# Altium PCB PCB1.PcbDoc (part 1 of 2)
Units mil, origin at the board's own origin, x right, y up, seen from the top; angles counter-clockwise.
Board outline 3937.01 x 3937.01 mil, 4 copper layers (L1, L2, L3, L4), stack 61.811 mil thick; 168 components, 216 nets, 917 pads, 302 vias.
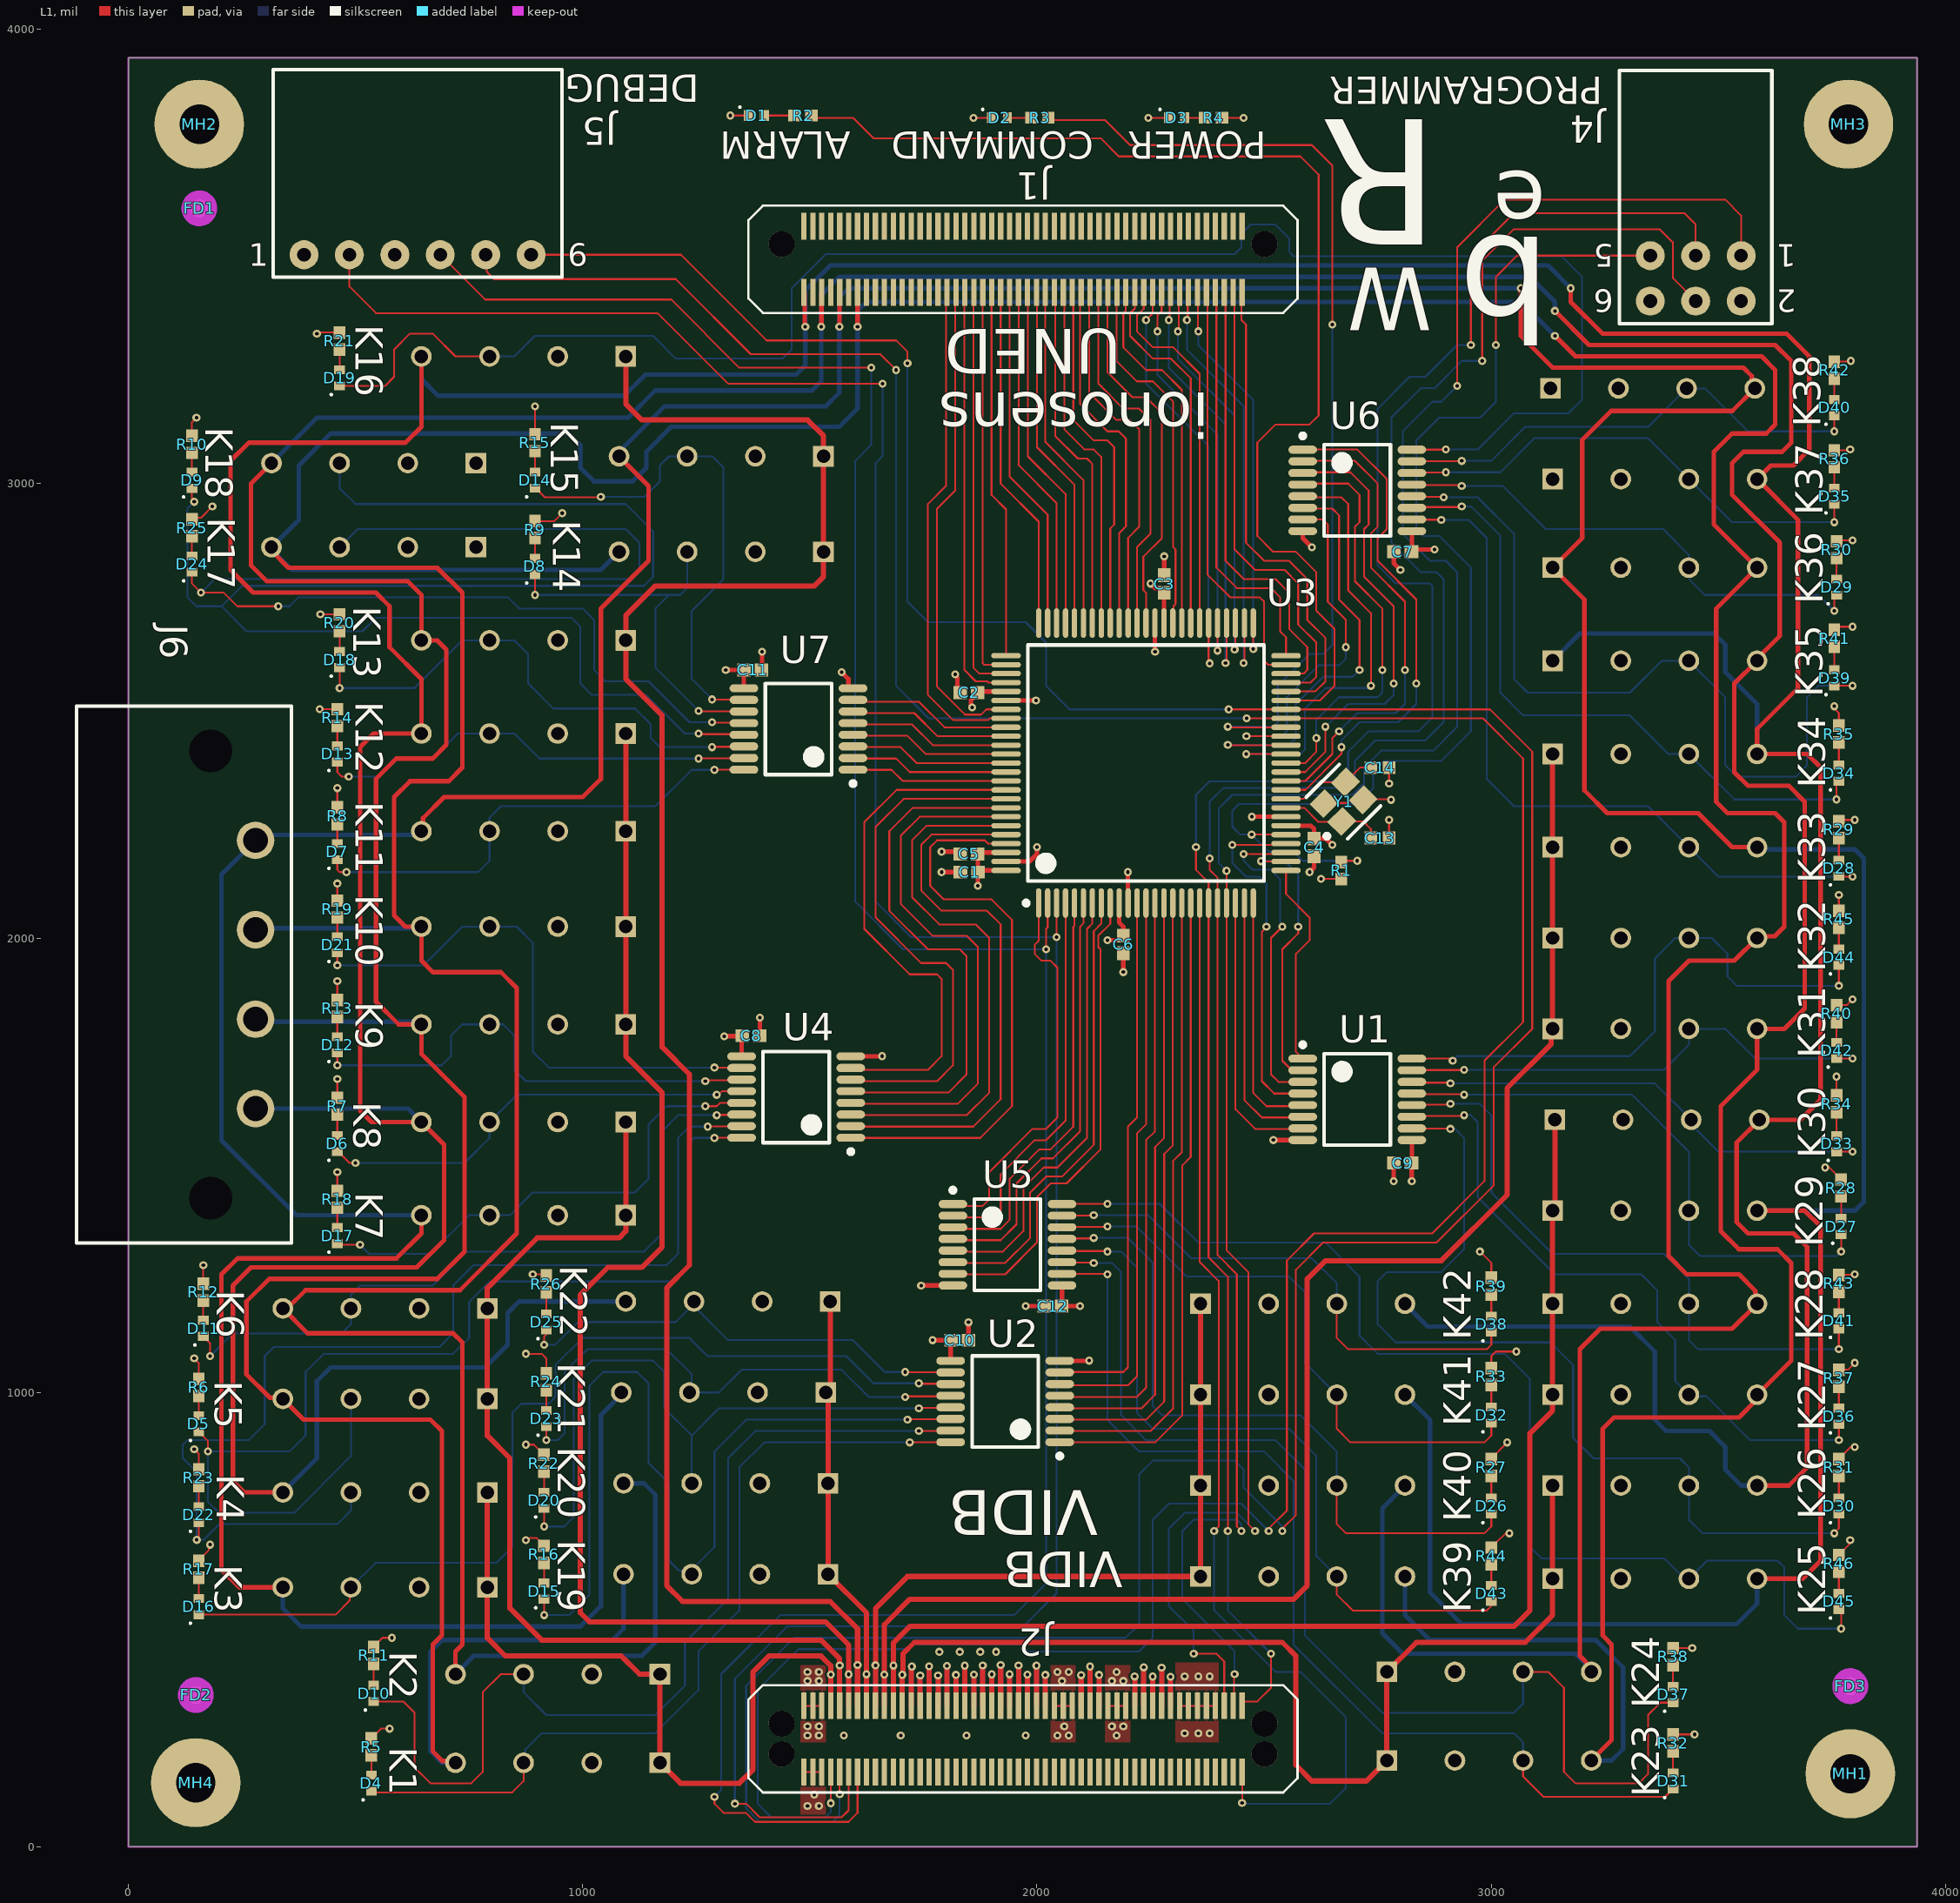
[diagram p0: L1 view]
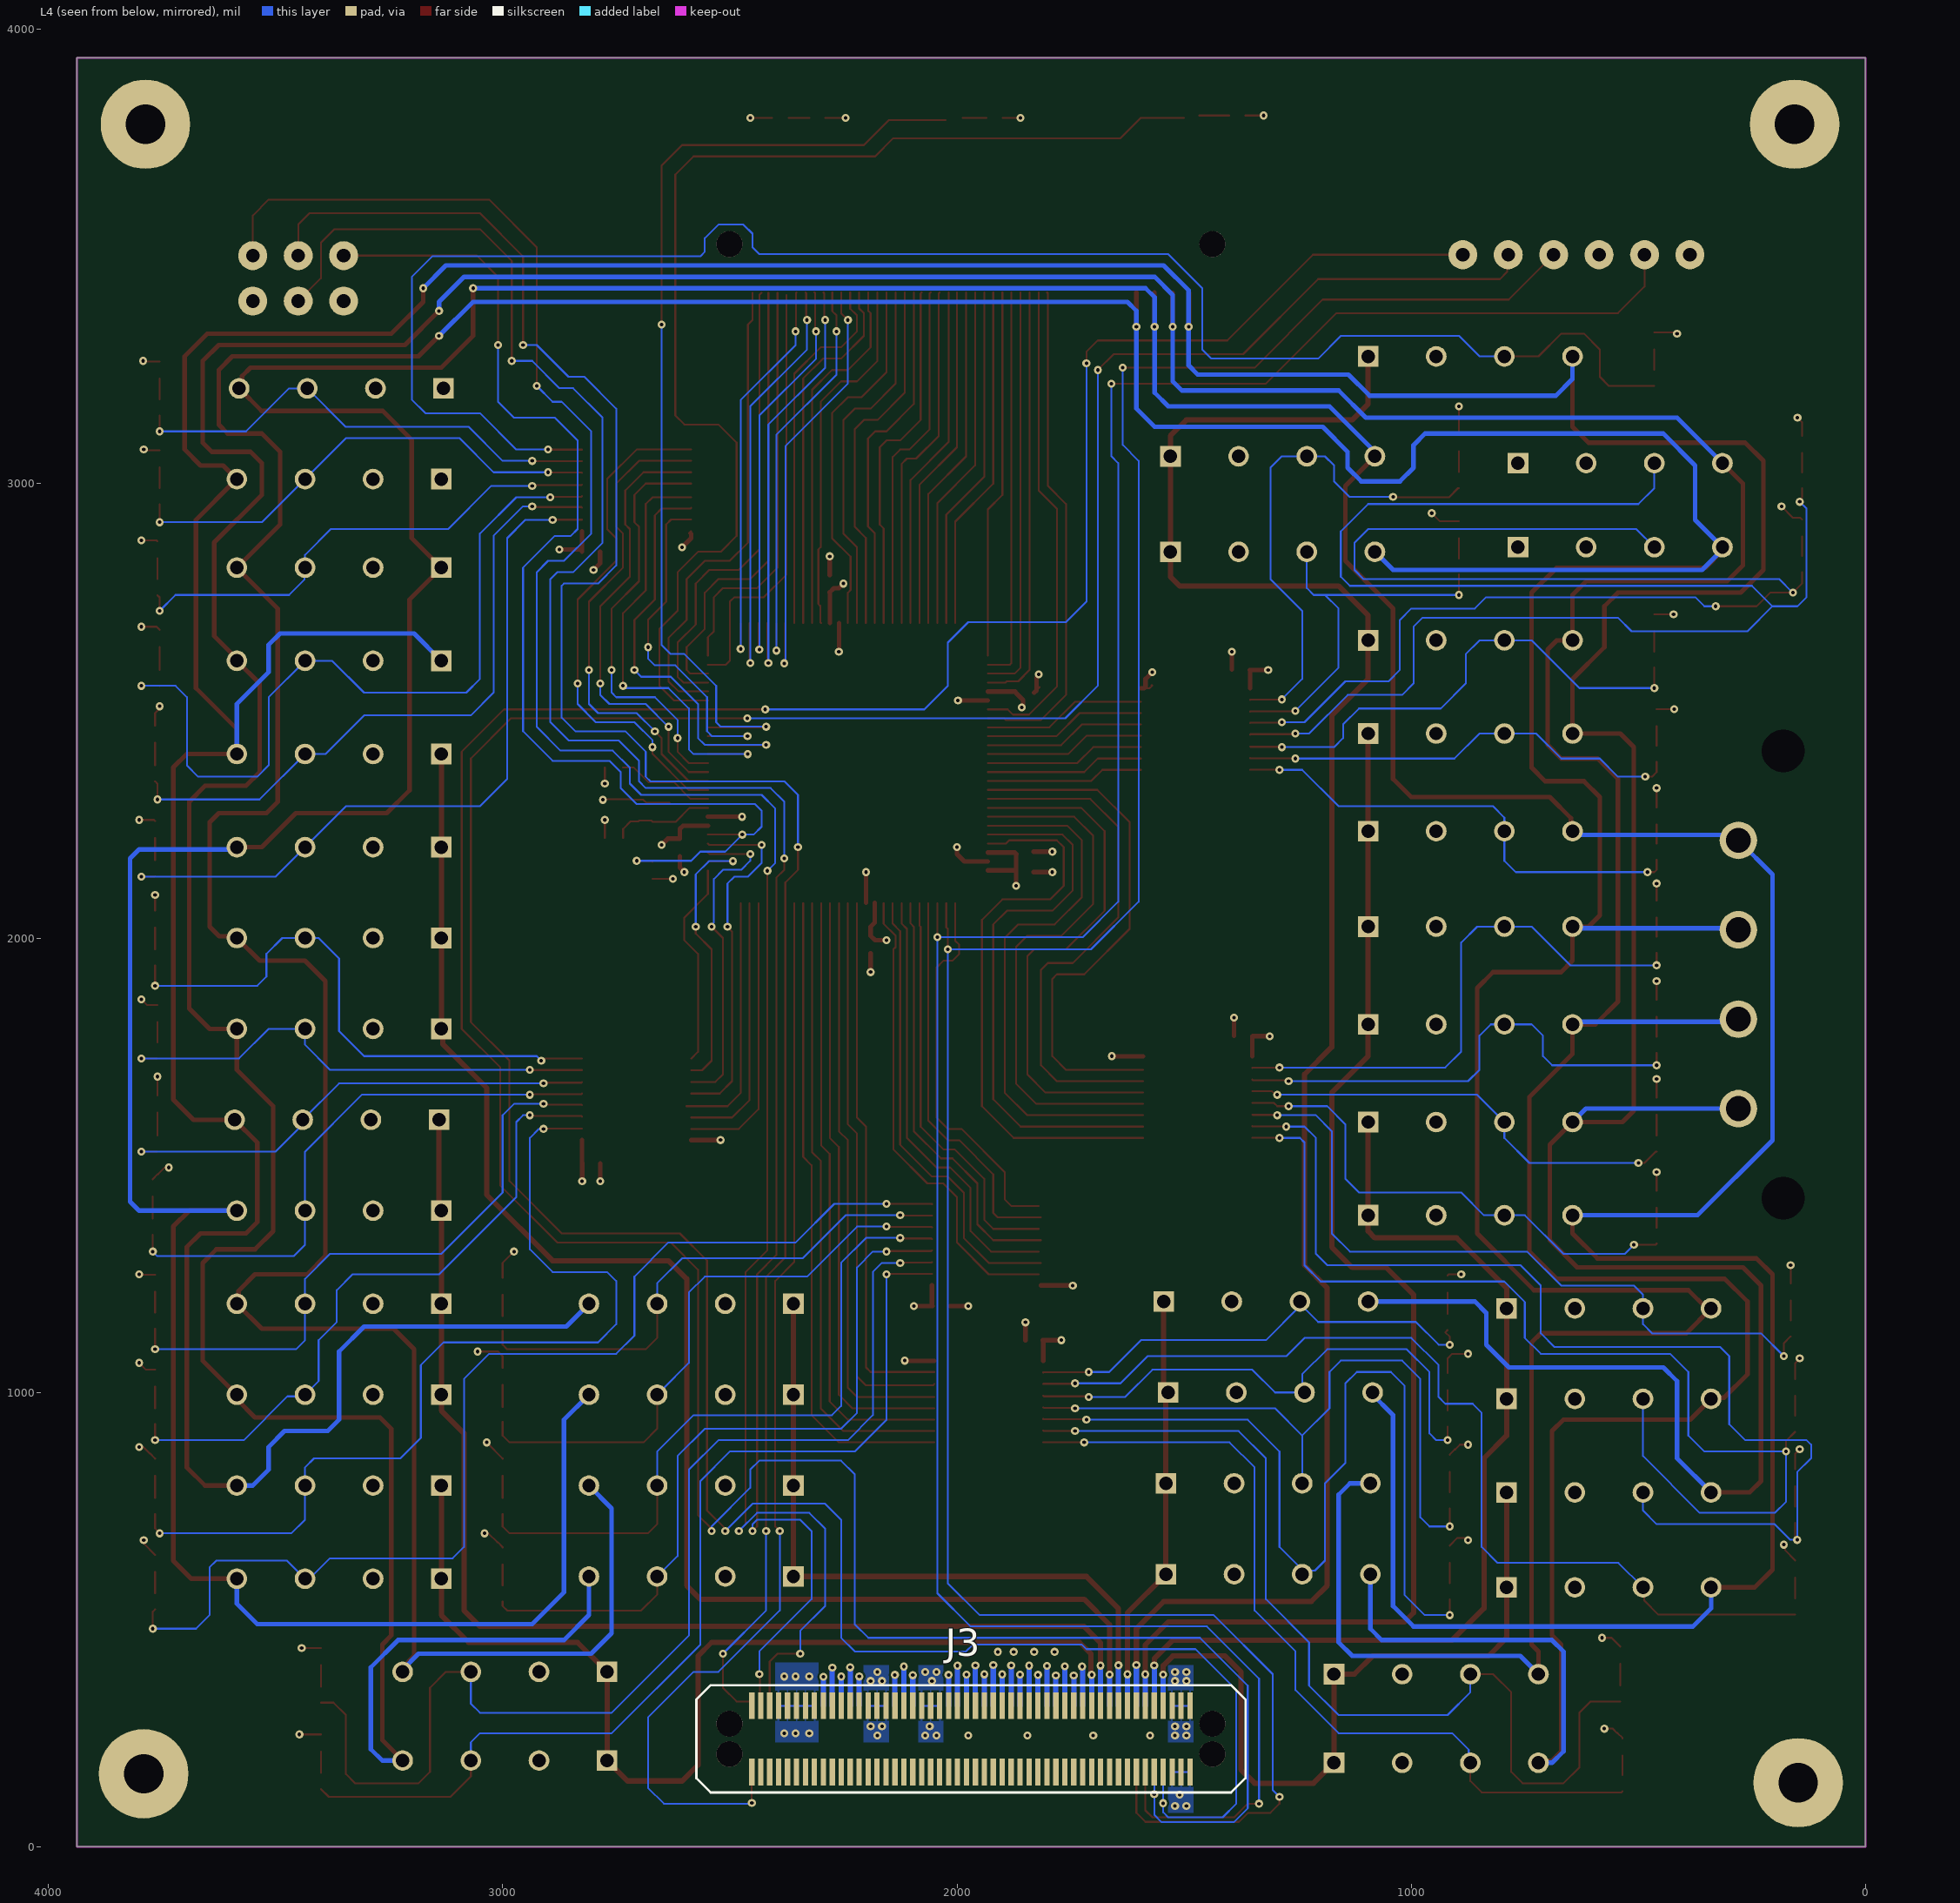
[diagram p1: L4 view, seen from below]
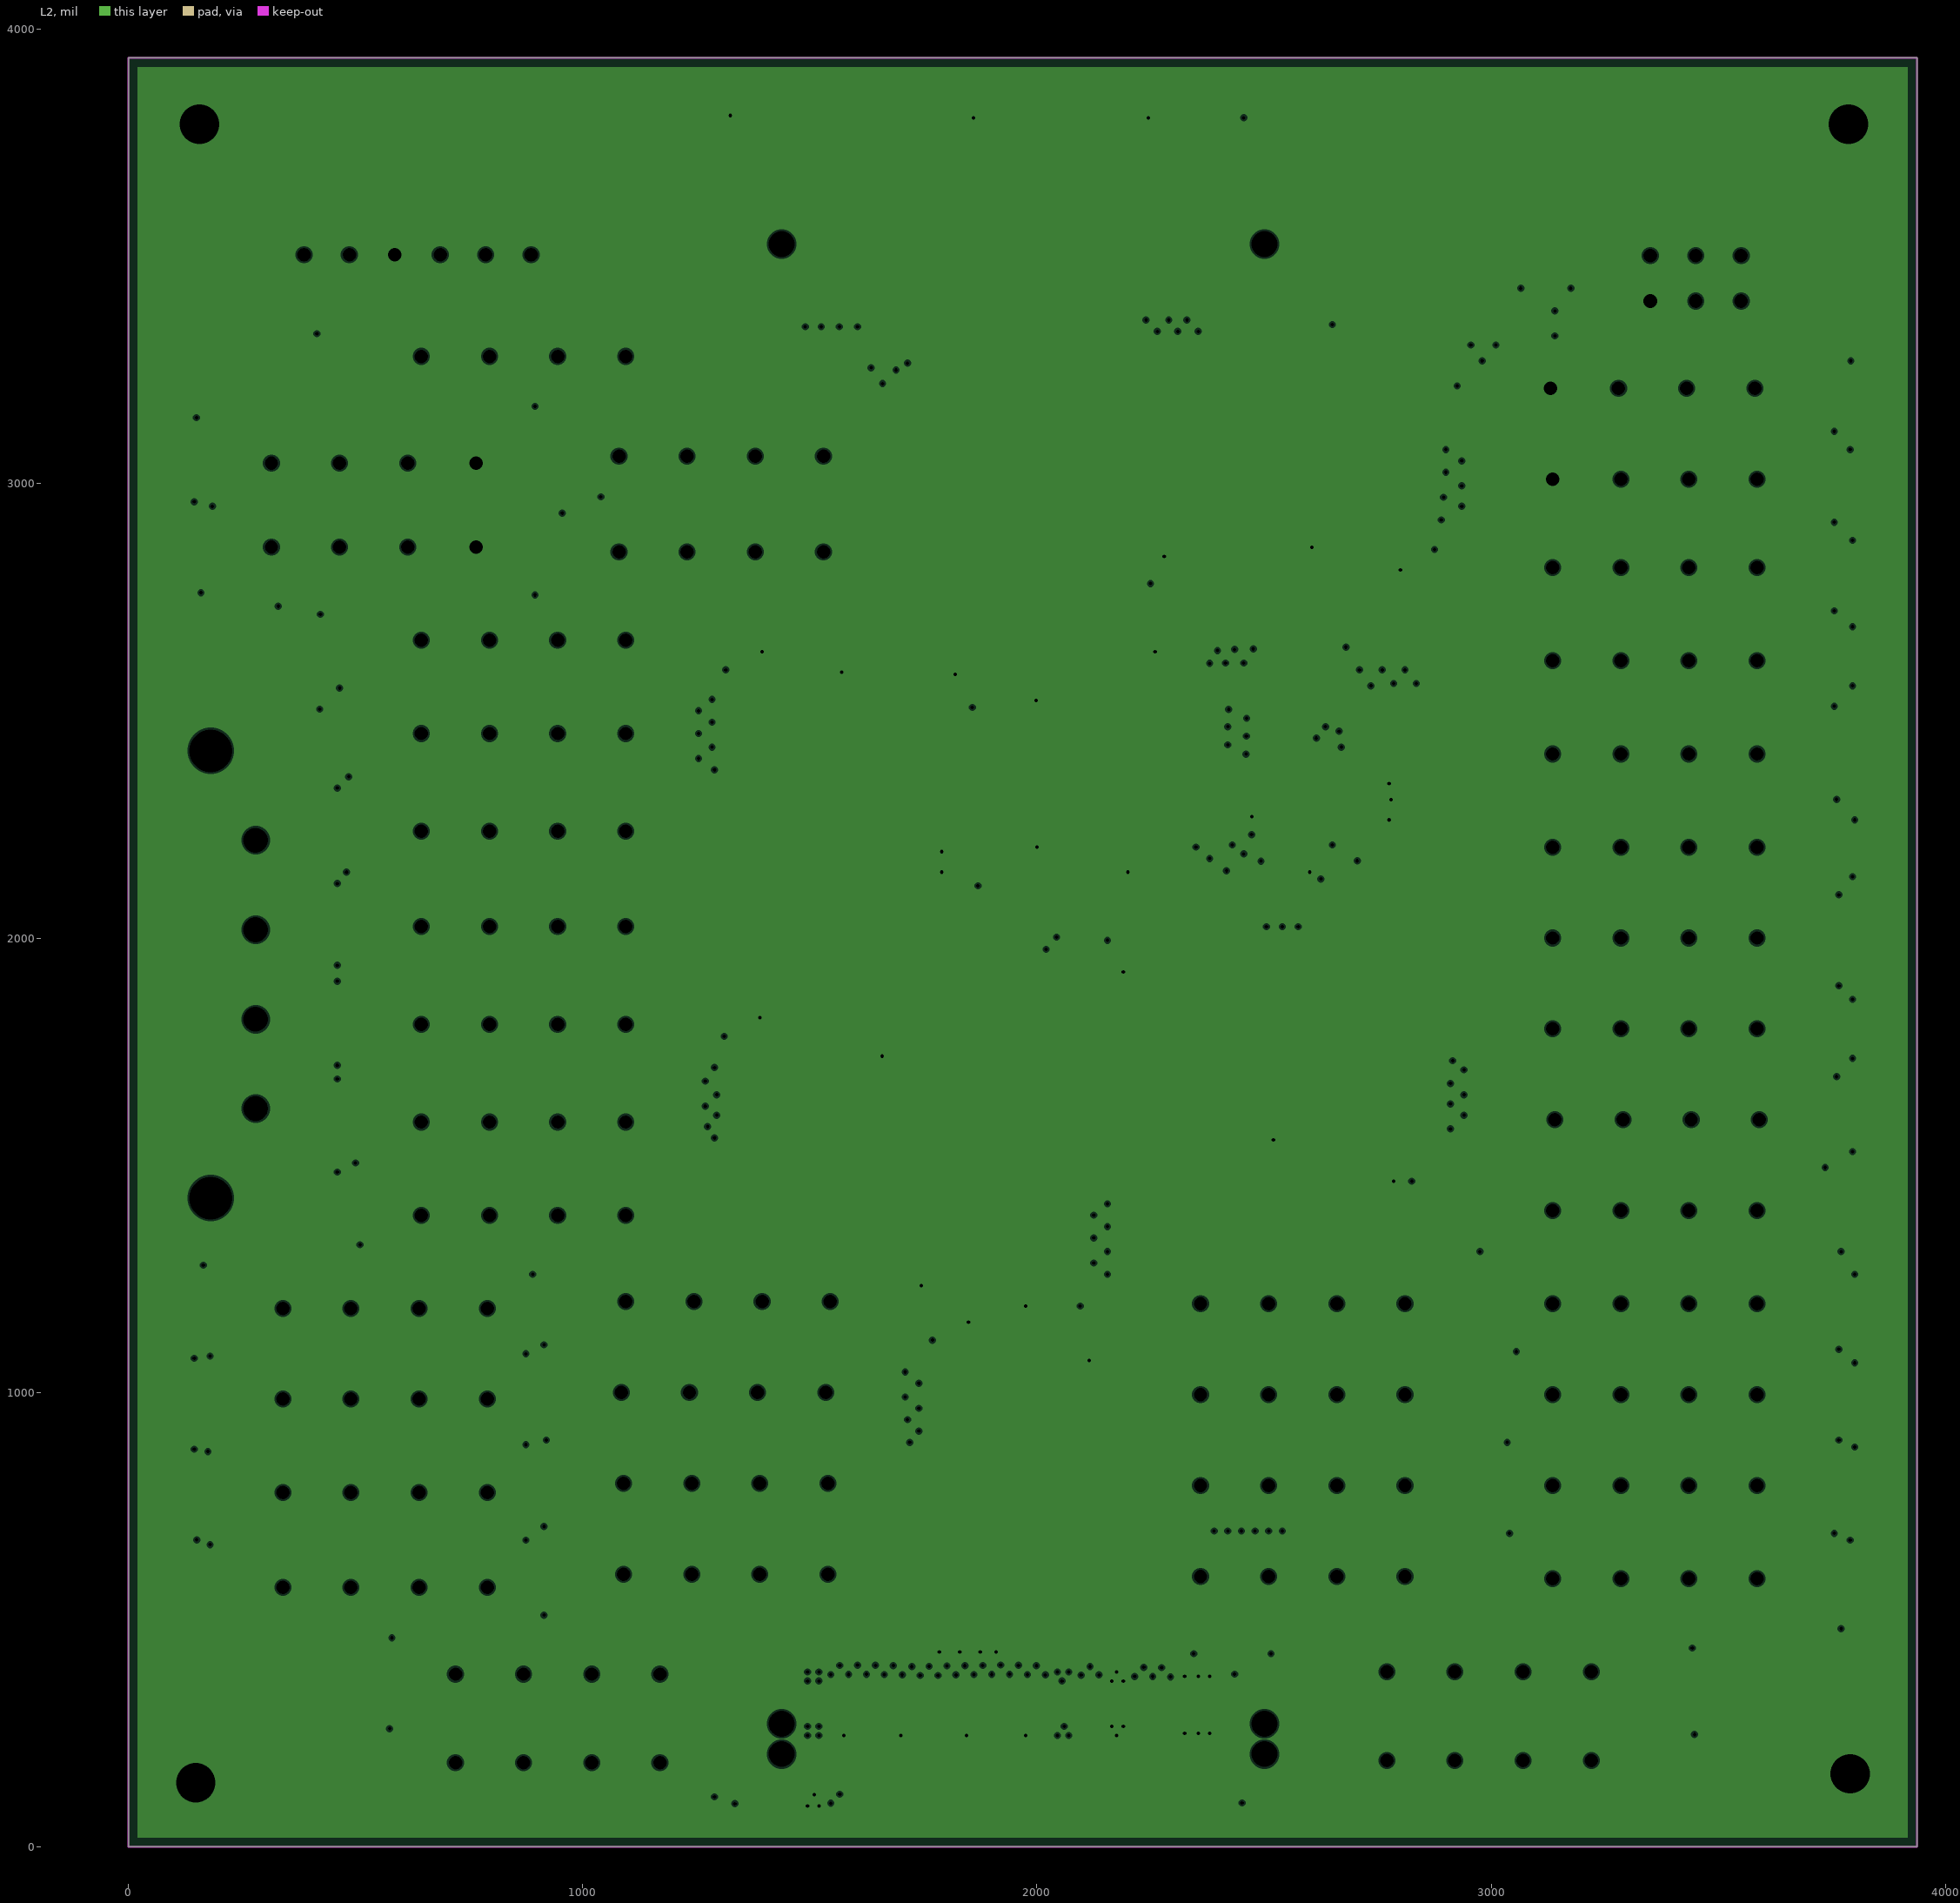
[diagram p2: L2, clearances drawn from the general rule]
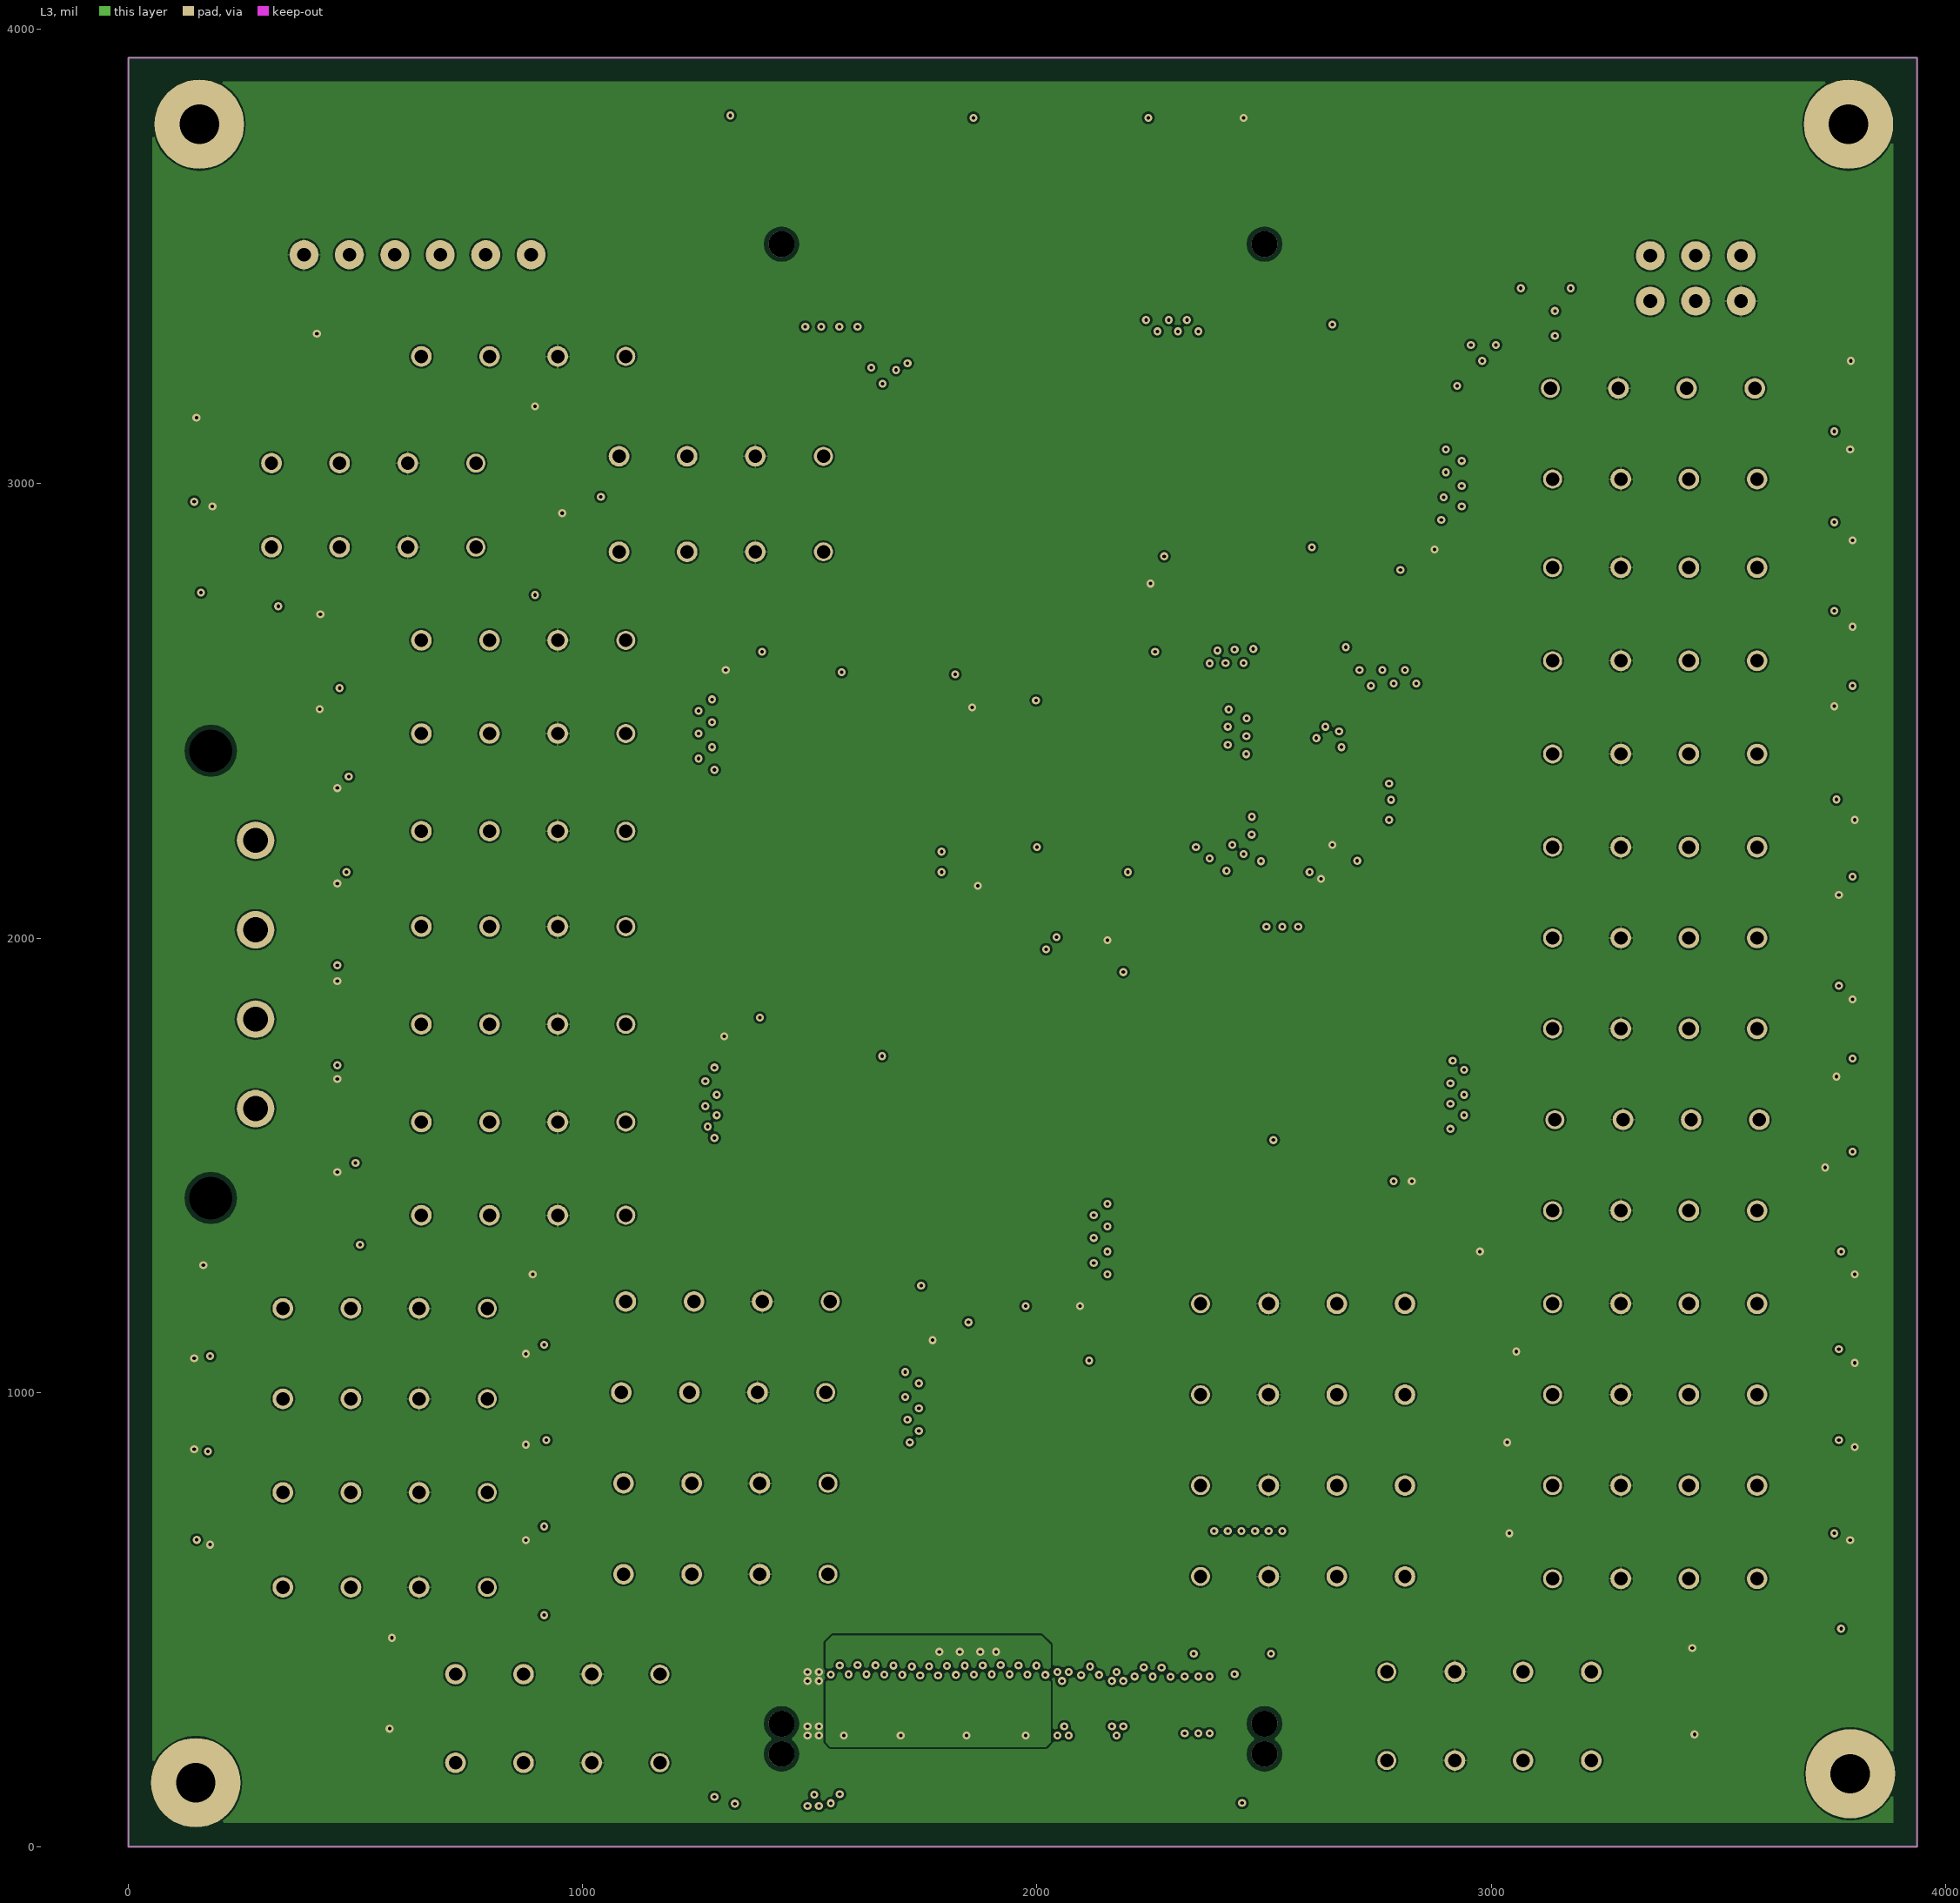
[diagram p3: L3]
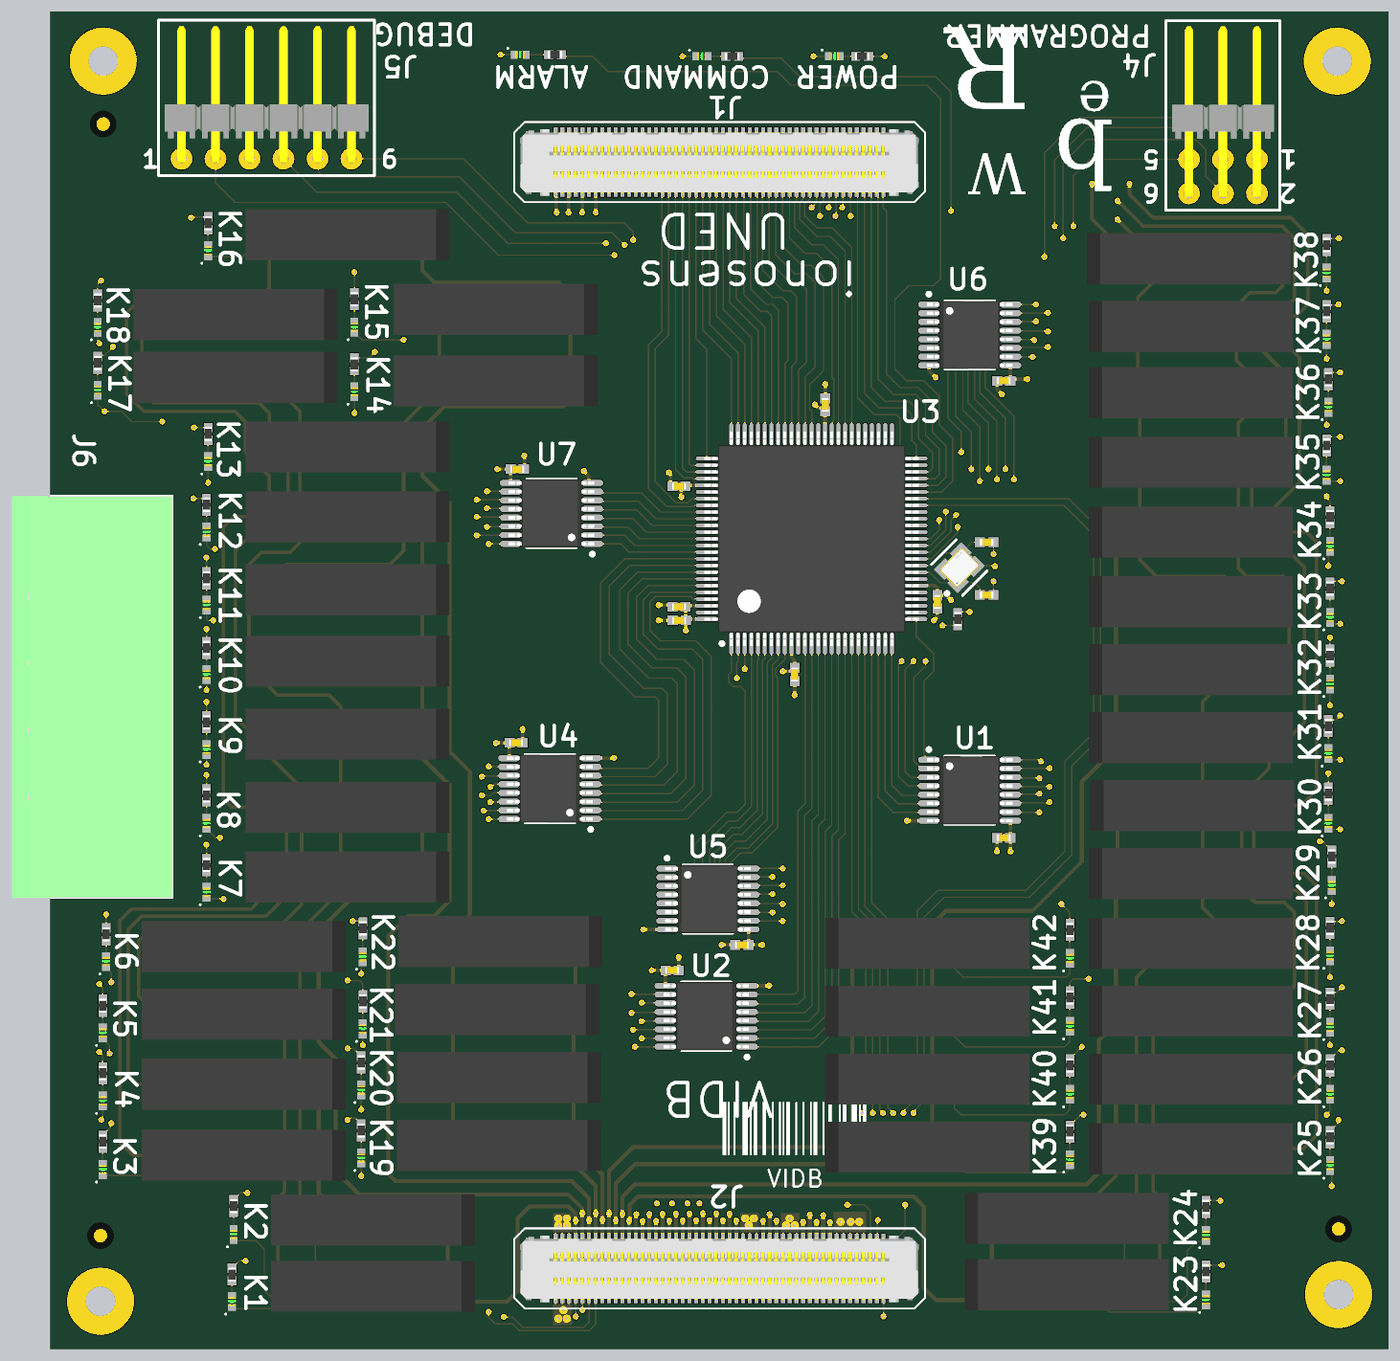
[diagram p5: 3D render of the assembled board from above, using the file's embedded part models]

## Layer stack, top to bottom
Top Mask: solder mask 0.5906, Solder Resist, Dk 3.8
L1: signal copper 1.378
Dielectric 1: prepreg 7.874, 7628, Dk 4.6
L2: plane copper 0.689, net GND
Core: core 41.9291, FR-4, Dk 4.5
L3: signal copper 0.689
Dielectric 2: prepreg 7.874, 7628, Dk 4.6
L4: signal copper 1.378
Bottom Mask: solder mask 0.5906, Solder Resist, Dk 3.8

## Board outline
0.25,0.25 3937.26,0.25 3937.26,3937.26 0.25,3937.26

## Design rules (kind name [scope] priority, off if disabled: settings)
BoardOutlineClearance [All] p1: gap=7.87 ignorepadtopadclearanceinfootprint=FALSE
Clearance Clearance_Keepout [OnLayer('Keep-Out Layer')] p1: gap=50 ignorepadtopadclearanceinfootprint=FALSE except(9.84: Arc-Hole Track-Hole SMDPad-Hole THPad-Hole Via-Hole Fill-Hole Poly-Hole Region-Hole Text-Hole; 25: Arc-THPad Track-THPad SMDPad-THPad THPad-THPad THPad-Via THPad-Fill THPad-Poly THPad-Region THPad-Text; 100: SMDPad-SMDPad)
Clearance [All] p2: gap=4 ignorepadtopadclearanceinfootprint=FALSE except(5: Arc-Via Track-Via SMDPad-Via THPad-Via Via-Via Via-Fill Via-Poly Via-Region Via-Text; 9.84: Arc-Hole Track-Hole SMDPad-Hole THPad-Hole Via-Hole Fill-Hole Poly-Hole Region-Hole Text-Hole)
ComponentClearance [All] p1: gap=4 collisioncheckmode=3 verticalgap=4 showdistances=TRUE
DiffPairsRouting [InDifferentialPair('DATA')] p1: maxlimit=10 minlimit=5 mostfreqgap=10 toplayer_maxgap=5 toplayer_prefgap=5 toplayer_minwidth=8.1 toplayer_maxwidth=8.1 toplayer_prefwidth=8.1 midlayer2_minwidth=15 midlayer2_maxwidth=15 midlayer2_prefwidth=15 bottomlayer_maxgap=5 bottomlayer_prefgap=5 bottomlayer_minwidth=8.1 bottomlayer_maxwidth=8.1 bottomlayer_prefwidth=8.1 impedanceprofiledriven=TRUE maxuncoupledlength=500
DiffPairsRouting DiffPairsRouting_1 [InDifferentialPair('D')] p2: maxlimit=10 minlimit=5 mostfreqgap=10 toplayer_maxgap=5 toplayer_prefgap=5 toplayer_minwidth=8.1 toplayer_maxwidth=8.1 toplayer_prefwidth=8.1 midlayer2_minwidth=15 midlayer2_maxwidth=15 midlayer2_prefwidth=15 bottomlayer_maxgap=5 bottomlayer_prefgap=5 bottomlayer_minwidth=8.1 bottomlayer_maxwidth=8.1 bottomlayer_prefwidth=8.1 impedanceprofiledriven=TRUE maxuncoupledlength=500
Height [All] p1: minheight=0 maxheight=71497.94 prefheight=500
HoleSize [All] p1: absolutevalues=TRUE maxlimit=248.03 minlimit=7.87 maxpercent=80.000 minpercent=20.000
HoleToHoleClearance [All] p1: gap=9.84 allowstackedmicrovias=FALSE
MatchedLengths [All] p1: tolerance=100 checknetsindiffpair=TRUE checkdiffpairvsdiffpair=FALSE checkxsignals=FALSE checkothers=FALSE
MinimumAnnularRing [All] p1: minimumring=3
MinimumSolderMaskSliver [All] p1: minsoldermaskwidth=0
PlaneClearance [All] p1: clearance=4
PlaneConnect PlaneConnectPowerPads [InPadClass('PowerPads')] p1: planeconnectstyle=Direct reliefexpansion=20 reliefentries=4 reliefconductorwidth=10 reliefairgap=10
PlaneConnect [All] p2: pad.planeconnectstyle=Relief pad.reliefexpansion=11.81 pad.reliefentries=4 pad.reliefconductorwidth=4 pad.reliefairgap=4 via.planeconnectstyle=Direct via.reliefexpansion=11.81 via.reliefentries=4 via.reliefconductorwidth=5 via.reliefairgap=5
PolygonConnect PolygonConnectPowerPads [All vs (InPadClass('PowerPads'))] p1: connectstyle=Direct reliefconductorwidth=10 reliefentries=4 polygonreliefangle="90 Angle" airgapwidth=10
PolygonConnect [All] p2: thpad.connectstyle=Relief thpad.reliefconductorwidth=4 thpad.reliefentries=4 thpad.polygonreliefangle="90 Angle" thpad.airgapwidth=4 smdpad.connectstyle=Relief smdpad.reliefconductorwidth=4 smdpad.reliefentries=4 smdpad.polygonreliefangle="90 Angle" smdpad.airgapwidth=4 via.connectstyle=Direct via.reliefconductorwidth=5 via.reliefentries=4 via.polygonreliefangle="90 Angle" via.airgapwidth=5
RoutingVias [All] p1: holewidth=7.87 width=17.72 viastyle="Through Hole" minholewidth=7.87 minwidth=17.72 maxholewidth=248.03 maxwidth=257.87
SilkToSilkClearance [All] p1: silktosilkclearance=0
SilkToSolderMaskClearance [IsPad] p1: minsilkscreentomaskgap=4 clearancetoexposedcopper=TRUE
SolderMaskExpansion [All] p1: expansion=2.95 istentingtop=FALSE
Width Width_Nodes [InNetClass('Nodes')] p1: maxlimit=11.55 minlimit=10 preferedwidth=11.55 toplayer_minwidth=11.55 midlayer2_maxwidth=10 midlayer2_prefwidth=10 bottomlayer_minwidth=11.55 minimp=50.000000 maximp=50.000000 favimp=50.000000
Width [All] p2: maxlimit=71497.94 minlimit=4 preferedwidth=4
20 further rules are at their usual default settings.

## Classes and differential pairs
net class Nodes: A B C D E F G H I J K L M N O P Q R S T U W X Y Z
component class Sheet3: D25 D26 D27 D28 D29 D30 D31 D32 D33 D34 D35 D36 D37 D38 D39 D40 D41 D42 D43 D44 D45 K22 K23 K24 K25 K26 K27 K28 K29 K30 K31 K32 K33 K34 K35 K36 K37 K38 K39 K40 K41 K42 R26 R27 R28 R29 R30 R31 R32 R33 R34 R35 R36 R37 R38 R39 R40 R41 R42 R43 R44 R45 R46
component class Sheet4: FD1 FD2 FD3 J1 J2 J3 J4 J5 J6 MH1 MH2 MH3 MH4
component class Sheet2: D4 D5 D6 D7 D8 D9 D10 D11 D12 D13 D14 D15 D16 D17 D18 D19 D20 D21 D22 D23 D24 K1 K2 K3 K4 K5 K6 K7 K8 K9 K10 K11 K12 K13 K14 K15 K16 K17 K18 K19 K20 K21 R5 R6 R7 R8 R9 R10 R11 R12 R13 R14 R15 R16 R17 R18 R19 R20 R21 R22 R23 R24 R25
component class Sheet1: C1 C2 C3 C4 C5 C6 C7 C8 C9 C10 C11 C12 C13 C14 D1 D2 D3 R1 R2 R3 R4 U1 U2 U3 U4 U5 U6 U7 Y1

## Components (designator, comment, footprint, x,y, rotation, side; value= is the part's Value field where it differs from the comment)
C1 "CC0402JRX7R7BB104" CAPC1005X06M#1 1850.71,2145 r0 top value=100nF
C2 "CC0402JRX7R7BB104" CAPC1005X06M#1 1850,2540 r0 top value=100nF
C3 "CC0402JRX7R7BB104" CAPC1005X06M#1 2280,2779.29 r270 top value=100nF
C4 "CC0402JRX7R7BB104" CAPC1005X06M#1 2610,2199.29 r90 top value=100nF
C5 "CC0402JRX7R7BB104" CAPC1005X06M#1 1850,2185 r0 top value=100nF
C6 "CC0402JRX7R7BB104" CAPC1005X06M#1 2190,1985.71 r90 top value=100nF
C7 "CC0402JRX7R7BB104" CAPC1005X06M#1 2805,2850 r0 top value=100nF
C8 "CC0402JRX7R7BB104" CAPC1005X06M#1 1370.71,1785 r180 top value=100nF
C9 "CC0402JRX7R7BB104" CAPC1005X06M#1 2805,1505 r0 top value=100nF
C10 "CC0402JRX7R7BB104" CAPC1005X06M#1 1830,1115 r180 top value=100nF
C11 "CC0402JRX7R7BB104" CAPC1005X06M#1 1374.29,2590 r180 top value=100nF
C12 "CC0402JRX7R7BB104" CAPC1005X06M#1 2035,1190 r0 top value=100nF
C13 "CC0402JRNPO9BN200" CAPC1005X06M#2 2755,2220 r180 top value=20pF
C14 "CC0402JRNPO9BN200" CAPC1005X06M#2 2755,2375 r180 top value=20pF
D1 "SML-P12UTT86R" DIOC1005X02R 1382.62,3810 r0 top
D2 "SML-P12UTT86R" DIOC1005X02R 1917.18,3805 r0 top
D3 "SML-P12UTT86R" DIOC1005X02R 2307.18,3805 r0 top
D4 "SML-P13PTT86R" DIOC1005X02R 535,140 r90 top
D5 "SML-P13PTT86R" DIOC1005X02R 155,930.99 r90 top
D6 "SML-P13PTT86R" DIOC1005X02R 460,1547.62 r90 top
D7 "SML-P13PTT86R" DIOC1005X02R 460,2190 r90 top
D8 "SML-P13PTT86R" DIOC1005X02R 895,2817.62 r90 top
D9 "SML-P13PTT86R" DIOC1005X02R 140,3007.18 r90 top
D10 "SML-P13PTT86R" DIOC1005X02R 540,337.62 r90 top
D11 "SML-P13PTT86R" DIOC1005X02R 165,1140.98 r90 top
D12 "SML-P13PTT86R" DIOC1005X02R 460,1765 r90 top
D13 "SML-P13PTT86R" DIOC1005X02R 460,2405 r90 top
D14 "SML-P13PTT86R" DIOC1005X02R 895,3007.62 r90 top
D15 "SML-P13PTT86R" DIOC1005X02R 915,562.62 r90 top
D16 "SML-P13PTT86R" DIOC1005X02R 155,528.6 r90 top
D17 "SML-P13PTT86R" DIOC1005X02R 460,1345 r90 top
D18 "SML-P13PTT86R" DIOC1005X02R 465,2612.62 r90 top
D19 "SML-P13PTT86R" DIOC1005X02R 465,3232.62 r90 top
D20 "SML-P13PTT86R" DIOC1005X02R 915,762.62 r90 top
D21 "SML-P13PTT86R" DIOC1005X02R 460,1985 r90 top
D22 "SML-P13PTT86R" DIOC1005X02R 155,730.99 r90 top
D23 "SML-P13PTT86R" DIOC1005X02R 920,942.62 r90 top
D24 "SML-P13PTT86R" DIOC1005X02R 140,2822.62 r90 top
D25 "SML-P13PTT86R" DIOC1005X02R 920,1155 r90 top
D26 "SML-P13PTT86R" DIOC1005X02R 3000,750 r90 top
D27 "SML-P13PTT86R" DIOC1005X02R 3770,1365 r90 top
D28 "SML-P13PTT86R" DIOC1005X02R 3765,2153.7 r90 top
D29 "SML-P13PTT86R" DIOC1005X02R 3760,2772.18 r90 top
D30 "SML-P13PTT86R" DIOC1005X02R 3765,750 r90 top
D31 "SML-P13PTT86R" DIOC1005X02R 3400,145 r90 top
D32 "SML-P13PTT86R" DIOC1005X02R 3000,950 r90 top
D33 "SML-P13PTT86R" DIOC1005X02R 3760,1547.18 r90 top
D34 "SML-P13PTT86R" DIOC1005X02R 3765,2362.62 r90 top
D35 "SML-P13PTT86R" DIOC1005X02R 3755,2972.18 r90 top
D36 "SML-P13PTT86R" DIOC1005X02R 3765,947.62 r90 top
D37 "SML-P13PTT86R" DIOC1005X02R 3400,335 r90 top
D38 "SML-P13PTT86R" DIOC1005X02R 3000,1150 r90 top
D39 "SML-P13PTT86R" DIOC1005X02R 3755,2572.18 r90 top
D40 "SML-P13PTT86R" DIOC1005X02R 3755,3167.18 r90 top
D41 "SML-P13PTT86R" DIOC1005X02R 3765,1157.62 r90 top
D42 "SML-P13PTT86R" DIOC1005X02R 3760,1752.62 r90 top
D43 "SML-P13PTT86R" DIOC1005X02R 3000,557.62 r90 top
D44 "SML-P13PTT86R" DIOC1005X02R 3765,1957.62 r90 top
D45 "SML-P13PTT86R" DIOC1005X02R 3765,540 r90 top
FD1 "FID1X2R" FID1X2R 156.26,3605.79 r0 top
FD2 "FID1X2R" FID1X2R 148.39,334.13 r90 top
FD3 "FID1X2R" FID1X2R 3790.12,353.66 r90 top
J1 "LSHM-150-06.0-L-DV-A-N-K-TR" LSHM_150_06_0_L_DV_A_N_K_TR 1969.25,3493.58 r180 top
J2 "LSHM-150-06.0-L-DV-A-N-K-TR" LSHM_150_06_0_L_DV_A_N_K_TR 1969.25,237.68 r180 top
J3 "LSHM-150-06.0-L-DV-A-N-K-TR" LSHM_150_06_0_L_DV_A_N_K_TR 1969.25,237.68 r180 bottom
J4 "TSW-103-08-F-D-RA" TSW-103-08-F-D-RA 3449.92,3611.69 r180 top
J5 "HTSW-106-08-F-S-RA" TSW-106-08-F-S-RA 636.57,3613.66 r0 top
J6 "1776715" 1776715 400.04,1920 r270 top
K1 "3570.1419.051" 3570.1419 945,185 r180 top
K2 "3570.1419.051" 3570.1419 945,380 r180 top
K3 "3570.1419.051" 3570.1419 565,570.99 r180 top
K4 "3570.1419.051" 3570.1419 565,780 r180 top
K5 "3570.1419.051" 3570.1419 565,985.99 r180 top
K6 "3570.1419.051" 3570.1419 565,1185 r180 top
K7 "3570.1419.051" 3570.1419 870,1390 r180 top
K8 "3570.1419.051" 3570.1419 870,1595 r180 top
K9 "3570.1419.051" 3570.1419 870,1810 r180 top
K10 "3570.1419.051" 3570.1419 870,2025 r180 top
K11 "3570.1419.051" 3570.1419 870,2235 r180 top
K12 "3570.1419.051" 3570.1419 870,2450 r180 top
K13 "3570.1419.051" 3570.1419 870,2655 r180 top
K14 "3570.1419.051" 3570.1419 1305,2850 r180 top
K15 "3570.1419.051" 3570.1419 1305,3060 r180 top
K16 "3570.1419.051" 3570.1419 870,3280 r180 top
K17 "3570.1419.051" 3570.1419 540,2860 r180 top
K18 "3570.1419.051" 3570.1419 540,3045 r180 top
K19 "3570.1419.051" 3570.1419 1315,600 r180 top
K20 "3570.1419.051" 3570.1419 1315,800 r180 top
K21 "3570.1419.051" 3570.1419 1310,1000 r180 top
K22 "3570.1419.051" 3570.1419 1320,1200 r180 top
K23 "3570.1419.051" 3570.1419 2995,190 r0 top
K24 "3570.1419.051" 3570.1419 2995,385 r0 top
K25 "3570.1419.051" 3570.1419 3360,590 r0 top
K26 "3570.1419.051" 3570.1419 3360,795 r0 top
K27 "3570.1419.051" 3570.1419 3360,995 r0 top
K28 "3570.1419.051" 3570.1419 3360,1195 r0 top
K29 "3570.1419.051" 3570.1419 3360,1400 r0 top
K30 "3570.1419.051" 3570.1419 3365,1600 r0 top
K31 "3570.1419.051" 3570.1419 3360,1800 r0 top
K32 "3570.1419.051" 3570.1419 3360,2000 r0 top
K33 "3570.1419.051" 3570.1419 3360,2200 r0 top
K34 "3570.1419.051" 3570.1419 3360,2405 r0 top
K35 "3570.1419.051" 3570.1419 3360,2610 r0 top
K36 "3570.1419.051" 3570.1419 3360,2815 r0 top
K37 "3570.1419.051" 3570.1419 3360,3010 r0 top
K38 "3570.1419.051" 3570.1419 3355,3209.57 r0 top
K39 "3570.1419.051" 3570.1419 2585,595 r0 top
K40 "3570.1419.051" 3570.1419 2585,795 r0 top
K41 "3570.1419.051" 3570.1419 2585,995 r0 top
K42 "3570.1419.051" 3570.1419 2585,1195 r0 top
MH1 "C500h220" C500h220z368#1 2940,885 r0 top
MH2 "C500h220" C500h220z368#2 330,3515 r0 top
MH3 "C500h220" C500h220z368#3 3255,2700 r0 top
MH4 "C500h220" C500h220z368#4 890,920 r0 top
R1 "AC0402FR-0710KL" RESC1005X04M 2670,2148.7 r270 top value=10k
R2 "AC0402FR-07240RL" RESC1005X04M 1485,3810 r180 top value=240
R3 "AC0402FR-07240RL" RESC1005X04M 2006.3,3805 r180 top value=240
R4 "AC0402FR-07240RL" RESC1005X04M 2388.7,3805 r180 top value=240
R5 "AC0402FR-07240RL" RESC1005X04M 535,220 r270 top value=240
R6 "AC0402FR-07240RL" RESC1005X04M 155,1010.99 r270 top value=240
R7 "AC0402FR-07240RL" RESC1005X04M 460,1630 r270 top value=240
R8 "AC0402FR-07240RL" RESC1005X04M 460,2268.7 r270 top value=240
R9 "AC0402FR-07240RL" RESC1005X04M 895,2898.7 r270 top value=240
R10 "AC0402FR-07240RL" RESC1005X04M 140,3086.3 r270 top value=240
R11 "AC0402FR-07240RL" RESC1005X04M 540,421.3 r270 top value=240
R12 "AC0402FR-07240RL" RESC1005X04M 165,1220.98 r270 top value=240
R13 "AC0402FR-07240RL" RESC1005X04M 460,1845 r270 top value=240
R14 "AC0402FR-07240RL" RESC1005X04M 460,2485 r270 top value=240
R15 "AC0402FR-07240RL" RESC1005X04M 895,3090 r270 top value=240
R16 "AC0402FR-07240RL" RESC1005X04M 915,643.7 r270 top value=240
R17 "AC0402FR-07240RL" RESC1005X04M 155,610.99 r270 top value=240
R18 "AC0402FR-07240RL" RESC1005X04M 460,1425 r270 top value=240
R19 "AC0402FR-07240RL" RESC1005X04M 460,2063.7 r270 top value=240
R20 "AC0402FR-07240RL" RESC1005X04M 465,2693.7 r270 top value=240
R21 "AC0402FR-07240RL" RESC1005X04M 465,3313.7 r270 top value=240
R22 "AC0402FR-07240RL" RESC1005X04M 915,844.13 r270 top value=240
R23 "AC0402FR-07240RL" RESC1005X04M 155,812.28 r270 top value=240
R24 "AC0402FR-07240RL" RESC1005X04M 920,1023.7 r270 top value=240
R25 "AC0402FR-07240RL" RESC1005X04M 140,2902.62 r270 top value=240
R26 "AC0402FR-07240RL" RESC1005X04M 920,1238.7 r270 top value=240
R27 "AC0402FR-07240RL" RESC1005X04M 3000,835 r270 top value=240
R28 "AC0402FR-07240RL" RESC1005X04M 3770,1450 r270 top value=240
R29 "AC0402FR-07240RL" RESC1005X04M 3765,2238.7 r270 top value=240
R30 "AC0402FR-07240RL" RESC1005X04M 3760,2854.57 r270 top value=240
R31 "AC0402FR-07240RL" RESC1005X04M 3765,835 r270 top value=240
R32 "AC0402FR-07240RL" RESC1005X04M 3400,228.7 r270 top value=240
R33 "AC0402FR-07240RL" RESC1005X04M 3000,1035 r270 top value=240
R34 "AC0402FR-07240RL" RESC1005X04M 3760,1635 r270 top value=240
R35 "AC0402FR-07240RL" RESC1005X04M 3765,2448.7 r270 top value=240
R36 "AC0402FR-07240RL" RESC1005X04M 3755,3054.57 r270 top value=240
R37 "AC0402FR-07240RL" RESC1005X04M 3765,1031.3 r270 top value=240
R38 "AC0402FR-07240RL" RESC1005X04M 3400,418.7 r270 top value=240
R39 "AC0402FR-07240RL" RESC1005X04M 3000,1233.7 r270 top value=240
R40 "AC0402FR-07240RL" RESC1005X04M 3760,1833.7 r270 top value=240
R41 "AC0402FR-07240RL" RESC1005X04M 3755,2659.57 r270 top value=240
R42 "AC0402FR-07240RL" RESC1005X04M 3755,3249.57 r270 top value=240
R43 "AC0402FR-07240RL" RESC1005X04M 3765,1240 r270 top value=240
R44 "AC0402FR-07240RL" RESC1005X04M 3000,640 r270 top value=240
R45 "AC0402FR-07240RL" RESC1005X04M 3765,2041.3 r270 top value=240
R46 "AC0402FR-07240RL" RESC1005X04M 3765,623.7 r270 top value=240
U1 "ULN2003AIPWR" TSOP65P640X120-16M 2705,1645 r0 top
U2 "ULN2003AIPWR" TSOP65P640X120-16M 1930,980 r180 top
U3 "ATMEGA2560-16AU" ATML-100A_M 2240,2385 r90 top
U4 "ULN2003AIPWR" TSOP65P640X120-16M 1470,1650 r180 top
U5 "ULN2003AIPWR" TSOP65P640X120-16M 1935,1325 r0 top
U6 "ULN2003AIPWR" TSOP65P640X120-16M 2705,2985 r0 top
U7 "ULN2003AIPWR" TSOP65P640X120-16M 1475,2460 r180 top
Y1 "Q24FA20H0024700" FA-20H 2675,2300 r45 top

## Footprints (in the part's own frame and the unit in brackets; to place one, negate y for a bottom-side part, rotate by r counter-clockwise, add the part's x,y. Pads: shape width x height; smd on the part's side, far side on the other; paste and mask are expansions set on the pad)
3570.1419 [mil] "Grade Mini SIP - 1 Form A"
  rect 45.28x45.28 / inner round 41.83 / far side rect 45.28x45.28 hole 29.53: 1(-225,0)
  round 45.28 hole 29.53: 2(-75,0) 3(75,0) 4(225,0)
  body extent -305,-75 295,75, height 255
1776715 [mm] "Pluggable Terminal Blocks 4 Pos 5mm pitch Thro ugh Hole Header"
  round 2.1 hole 1.4: 1(-7.493,-3.048) 2(-2.493,-3.048) 3(2.507,-3.048) 4(7.507,-3.048)
  round 0 hole 2.4: MH1(-12.493,-5.548) MH2(12.507,-5.548)
  silkscreen extent -14.99,-13.05 15.01,-1.05, body extent -14.99,-13.05 15.01,-1.05, height 8.6
ATML-100A_M [mm] "TQFP, 100-Leads, Body 14x14mm, Pitch 0.5mm, IPC Low Density"
  oval 1.65x0.3 smd: 1(-7.825,6) 2(-7.825,5.5) 3(-7.825,5) 4(-7.825,4.5) 5(-7.825,4) 6(-7.825,3.5) 7(-7.825,3) 8(-7.825,2.5) 9(-7.825,2) 10(-7.825,1.5) 11(-7.825,1) 12(-7.825,0.5) 13(-7.825,0) 14(-7.825,-0.5) 15(-7.825,-1) 16(-7.825,-1.5) 17(-7.825,-2) 18(-7.825,-2.5) 19(-7.825,-3) 20(-7.825,-3.5) 21(-7.825,-4) 22(-7.825,-4.5) 23(-7.825,-5) 24(-7.825,-5.5) 25(-7.825,-6) 51(7.825,-6) 52(7.825,-5.5) 53(7.825,-5) 54(7.825,-4.5) 55(7.825,-4) 56(7.825,-3.5) 57(7.825,-3) 58(7.825,-2.5) 59(7.825,-2) 60(7.825,-1.5) 61(7.825,-1) 62(7.825,-0.5) 63(7.825,0) 64(7.825,0.5) 65(7.825,1) 66(7.825,1.5) 67(7.825,2) 68(7.825,2.5) 69(7.825,3) 70(7.825,3.5) 71(7.825,4) 72(7.825,4.5) 73(7.825,5) 74(7.825,5.5) 75(7.825,6)
  oval 0.3x1.65 smd: 26(-6,-7.825) 27(-5.5,-7.825) 28(-5,-7.825) 29(-4.5,-7.825) 30(-4,-7.825) 31(-3.5,-7.825) 32(-3,-7.825) 33(-2.5,-7.825) 34(-2,-7.825) 35(-1.5,-7.825) 36(-1,-7.825) 37(-0.5,-7.825) 38(0,-7.825) 39(0.5,-7.825) 40(1,-7.825) 41(1.5,-7.825) 42(2,-7.825) 43(2.5,-7.825) 44(3,-7.825) 45(3.5,-7.825) 46(4,-7.825) 47(4.5,-7.825) 48(5,-7.825) 49(5.5,-7.825) 50(6,-7.825) 76(6,7.825) 77(5.5,7.825) 78(5,7.825) 79(4.5,7.825) 80(4,7.825) 81(3.5,7.825) 82(3,7.825) 83(2.5,7.825) 84(2,7.825) 85(1.5,7.825) 86(1,7.825) 87(0.5,7.825) 88(0,7.825) 89(-0.5,7.825) 90(-1,7.825) 91(-1.5,7.825) 92(-2,7.825) 93(-2.5,7.825) 94(-3,7.825) 95(-3.5,7.825) 96(-4,7.825) 97(-4.5,7.825) 98(-5,7.825) 99(-5.5,7.825) 100(-6,7.825)
  silkscreen extent -7.95,-6.6 6.6,6.82, body extent -8,-8 8,8, height 1.2
C500h220z368#1 [mm] "C500h220z368 hole"
  round 5 hole 2.2: 1(21.593,-18.392)
C500h220z368#2 [mm] "C500h220z368 hole"
  round 5 hole 2.2: 1(-4.413,7.006)
C500h220z368#3 [mm] "C500h220z368 hole"
  round 5 hole 2.2: 1(13.492,27.707)
C500h220z368#4 [mm] "C500h220z368 hole"
  round 5 hole 2.2: 1(-18.837,-19.781)
CAPC1005X06M#1 [mm] "Chip Capacitor, 2-Leads, Body 1,00x0,50mm, IPC Low Density"
  rect 0.76x0.72 smd: 1(-0.49,0) 2(0.49,0)
  body extent -0.53,-0.28 0.53,0.28, height 0.55
CAPC1005X06M#2 [mm] "Chip Capacitor, 2-Leads, Body 1,00x0,50mm, IPC Low Density"
  rect 0.72x0.72 smd: 1(-0.51,0) 2(0.51,0)
  body extent -0.53,-0.28 0.53,0.28, height 0.55
DIOC1005X02R [mm] "Chip Diode, 2-Leads, Body 1,00x0,50mm, Manufacturer Recommended"
  rect 0.5x0.6 smd paste+0 mask+0: 1(-0.447,0) 2(0.453,0)
  silkscreen extent -0.98,0.42 -0.88,0.52, body extent -0.8,-0.43 0.8,0.43, height 0.25
FA-20H [mm] "SEIKO EPSON CRYSTAL"
  rect 1.2x1.1 smd paste+0 mask+0: 1(-0.85,-0.7) 2(0.85,-0.7) 3(0.85,0.7) 4(-0.85,0.7)
  silkscreen extent -2.15,-1.63 1.3,1.65, body extent -1.55,-1.35 1.55,1.35, height 0.25
FID1X2R [mm] "Fiducial - Round 1x2mm"
  round 1 smd paste-0.5 mask+0.5: 0(0,0)
  L1 keep-out circle w1: c0,0 r0.5
  L1 keep-out region: 0,0
LSHM_150_06_0_L_DV_A_N_K_TR [mm] "LSHM_150_06_0_L_DV_A_N_K_TR Without Shield"
  rect 0.3x1.5 smd: 1(12.25,-1.85) 2(12.25,1.85) 3(11.75,-1.85) 4(11.75,1.85) 5(11.25,-1.85) 6(11.25,1.85) 7(10.75,-1.85) 8(10.75,1.85) 9(10.25,-1.85) 10(10.25,1.85) 11(9.75,-1.85) 12(9.75,1.85) 13(9.25,-1.85) 14(9.25,1.85) 15(8.75,-1.85) 16(8.75,1.85) 17(8.25,-1.85) 18(8.25,1.85) 19(7.75,-1.85) 20(7.75,1.85) 21(7.25,-1.85) 22(7.25,1.85) 23(6.75,-1.85) 24(6.75,1.85) 25(6.25,-1.85) 26(6.25,1.85) 27(5.75,-1.85) 28(5.75,1.85) 29(5.25,-1.85) 30(5.25,1.85) 31(4.75,-1.85) 32(4.75,1.85) 33(4.25,-1.85) 34(4.25,1.85) 35(3.75,-1.85) 36(3.75,1.85) 37(3.25,-1.85) 38(3.25,1.85) 39(2.75,-1.85) 40(2.75,1.85) 41(2.25,-1.85) 42(2.25,1.85) 43(1.75,-1.85) 44(1.75,1.85) 45(1.25,-1.85) 46(1.25,1.85) 47(0.75,-1.85) 48(0.75,1.85) 49(0.25,-1.85) 50(0.25,1.85) 51(-0.25,-1.85) 52(-0.25,1.85) 53(-0.75,-1.85) 54(-0.75,1.85) 55(-1.25,-1.85) 56(-1.25,1.85) 57(-1.75,-1.85) 58(-1.75,1.85) 59(-2.25,-1.85) 60(-2.25,1.85) 61(-2.75,-1.85) 62(-2.75,1.85) 63(-3.25,-1.85) 64(-3.25,1.85) 65(-3.75,-1.85) 66(-3.75,1.85) 67(-4.25,-1.85) 68(-4.25,1.85) 69(-4.75,-1.85) 70(-4.75,1.85) 71(-5.25,-1.85) 72(-5.25,1.85) 73(-5.75,-1.85) 74(-5.75,1.85) 75(-6.25,-1.85) 76(-6.25,1.85) 77(-6.75,-1.85) 78(-6.75,1.85) 79(-7.25,-1.85) 80(-7.25,1.85) 81(-7.75,-1.85) 82(-7.75,1.85) 83(-8.25,-1.85) 84(-8.25,1.85) 85(-8.75,-1.85) 86(-8.75,1.85) 87(-9.25,-1.85) 88(-9.25,1.85) 89(-9.75,-1.85) 90(-9.75,1.85) 91(-10.25,-1.85) 92(-10.25,1.85) 93(-10.75,-1.85) 94(-10.75,1.85) 95(-11.25,-1.85) 96(-11.25,1.85) 97(-11.75,-1.85) 98(-11.75,1.85) 99(-12.25,-1.85) 100(-12.25,1.85)
  round 1.45 hole 1.45 unplated: ""(-13.5,-0.85) ""(13.5,-0.85)
  silkscreen extent -15.35,-3 15.35,3, body extent -14.88,-2.46 14.92,2.52, height 7.3
RESC1005X04M [mm] "Chip Resistor, 2-Leads, Body 1,00x0,50mm, IPC Low Density"
  rect 0.7x0.65 smd: 1(-0.475,0) 2(0.475,0)
  body extent -0.53,-0.28 0.53,0.28, height 0.37
TSOP65P640X120-16M [mm] "TSOP, 16-Leads, Body 5,00x4,40mm, Pitch 0,65mm, IPC Low Density"
  oval 1.6x0.45 smd: 1(-3.05,2.275) 2(-3.05,1.625) 3(-3.05,0.975) 4(-3.05,0.325) 5(-3.05,-0.325) 6(-3.05,-0.975) 7(-3.05,-1.625) 8(-3.05,-2.275) 9(3.05,-2.275) 10(3.05,-1.625) 11(3.05,-0.975) 12(3.05,-0.325) 13(3.05,0.325) 14(3.05,0.975) 15(3.05,1.625) 16(3.05,2.275)
  silkscreen extent -3.17,-2.55 1.85,3.17, body extent -3.2,-2.55 3.2,2.55, height 1.2
TSW-103-08-F-D-RA [mil] "6 Pin Header Vertical, right-angle"
  round 63.78 hole 30: 1(-100,110) 2(-100,210) 3(0,110) 4(0,210) 5(100,110) 6(100,210)
  silkscreen extent -168,-298 168,260, body extent -150,-281 150,221, height 218
TSW-106-08-F-S-RA [mil] "6 Pin Header, right-angle, 1 row"
  round 63.78 hole 30: 1(-250,-110) 2(-150,-110) 3(-50,-110) 4(50,-110) 5(150,-110) 6(250,-110)
  silkscreen extent -318,-160 318,298, body extent -300,-122 300,280, height 121

## Part data
C1 C2 C3 C4 C5 C6 C7 C8 C9 C10 C11 C12: library part C01-0402-01-00001-1, "Cap Ceramic 100nF 50V X7R 5% SMD 0402 125°C", Capacitor Type=Ceramic, Case/Package=0402, Dielectric=X7R, Manufacturer=YAGEO, Max Operating Temperature=125°C, Min Operating Temperature=-55°C, Tolerance=5%, Voltage Rating=16V, Composition=Ceramic, Depth=500µm, Length=1mm, Manufacturer P/N=CC0402JRX7R7BB104, Mount="Surface Mount", Mounting Technology="Surface Mount", Pins=2, RoHS Compliant=Yes, Termination=SMD/SMT, Thickness=558.8µm, Voltage Rating (DC)=16V, Width=508µm
C13 C14: library part C01-0402-01-00008-1, "Cap Ceramic 20pF 50V C0G 5% SMD 0402 125°C", Capacitor Type=Ceramic, Case/Package=0402, Dielectric=COG, Manufacturer=YAGEO, Max Operating Temperature=125°C, Min Operating Temperature=-55°C, Tolerance=5%, Voltage Rating=50V, Composition=Ceramic, Depth=500µm, Length=990.6µm, Manufacturer P/N=CC0402JRNPO9BN200, Mount="Surface Mount", Mounting Technology="Surface Mount", Pins=2, RoHS Compliant=Yes, Termination=SMD/SMT, Thickness=558.8µm, Voltage Rating (DC)=50V, Width=508µm
D1 D2 D3: library part D01-0402-01-00001-1, "Led red 0402", Case/Package=0402, Colour=red, Forward Current="20 mA", Forward Voltage=2V, Manufacturer=ROHM, Max Operating Temperature=85°C, Max Power Dissipation=52mW, Min Operating Temperature=-40°C, Dominant Wavelength="620 nm", Lens Style="Rectangular, Square", Luminous Intensity="85 mcd", Manufacturer P/N=SML-P12UTT86R, Mounting Technology=SMD, Number of LEDs=1, Pins=2, RoHS Compliant=Yes
D4 D5 D6 D7 D8 D9 D10 D11 D12 D13 D14 D15 D16 D17 D18 D19 D20 D21 D22 D23 D24 D25 D26 D27 D28 D29 D30 D31 D32 D33 D34 D35 D36 D37 D38 D39 D40 D41 D42 D43 D44 D45: library part D01-0402-01-00000-1, "Led green 0402", Case/Package=0402, Colour=Green, Forward Current="20 mA", Forward Voltage=2.1V, Manufacturer=ROHM, Max Operating Temperature=85°C, Max Power Dissipation=52mW, Min Operating Temperature=-40°C, Dominant Wavelength="560 nm", Lens Style="Rectangular, Square", Luminous Intensity="10 mcd", Manufacturer P/N=SML-P13PTT86R, Mounting Technology=SMD, Number of LEDs=1, Pins=2, RoHS Compliant=Yes
FD1 FD2 FD3: library part CMP-00028-00005-2, "Fiducial - Round 1x2mm", Pins=0
J1 J2 J3: library part J01-001-01-00001-2, "Conn Socket and Terminal Strip HDR/SKT 100 POS 0.5mm Solder ST SMD T/R", Case/Package=SMD, Housing Color=Black, Manufacturer=Samtec, Max Operating Temperature=125°C, Min Operating Temperature=-55°C, Contact Material=Bronze, Contact Plating=Gold, Depth="4.98 mm", Gender=HERMAPHRODITIC, Housing Material=Polymer, Length="29.7 mm", Manufacturer P/N=LSHM-150-06.0-L-DV-A-N-K-TR, Mounting Technology=SMD, Number of Rows=2, Orientation=Straight, Pins=100, Pitch="500 µm", RoHS Compliant=Yes, Termination=Solder
J4: library part J01-001-01-00003-2, "6 Vias Pin Header 2.54mm, Right Angle", Case/Package="Through Hole", Housing Color=Black, Manufacturer=Samtec, Max Operating Temperature=125°C, Min Operating Temperature=-55°C, Contact Material=Bronze, Contact Plating=Gold, Depth="4.87 mm", Gender=Male, Housing Material=Polyester, Length="7.62 mm", Manufacturer P/N=TSW-103-08-F-D-RA, Mounting Technology="Through Hole", Number of Rows=2, Orientation=Straight, Pins=6, Pitch=2.54mm, RoHS Compliant=Yes, Termination=Solder
J5: library part J01-001-01-00005-2, "6 Vias Pin Header 2.54mm, Right Angle, 1 Row", Case/Package="Through Hole", Housing Color=Black, Manufacturer=Samtec, Max Operating Temperature=125°C, Min Operating Temperature=-55°C, Contact Material=Bronze, Contact Plating=Gold, Depth="4.87 mm", Gender=Male, Housing Material=Polyester, Length="7.62 mm", Manufacturer P/N=HTSW-106-08-F-S-RA, Mounting Technology="Through Hole", Number of Rows=2, Orientation=Straight, Pins=6, Pitch=2.54mm, RoHS Compliant=Yes, Termination=Solder
J6: library part J01-001-01-00007-2, "Pluggable Terminal Blocks 4 Pos 5mm pitch Thro ugh Hole Header", Case/Package=TH, Housing Color=Green, Manufacturer="Phoenix Contact", Max Operating Temperature=125°C, Min Operating Temperature=-55°C, Contact Material=-, Contact Plating=Tin, Depth=12, Gender=Male, Housing Material=Polybutylene, Length=30, Manufacturer P/N=1776715, Mounting Technology=TH, Number of Rows=1, Orientation="Right Angle", Pins=4, Pitch=5, RoHS Compliant=Yes, Termination=Solder
K1 K2 K3 K4 K5 K6 K7 K8 K9 K10 K11 K12 K13 K14 K15 K16 K17 K18 K19 K20 K21 K22 K23 K24 K25 K26 K27 K28 K29 K30 K31 K32 K33 K34 K35 K36 K37 K38 K39 K40 K41 K42: library part K01-0008-01-00008-1, "Reed Relay, Mini SIP, 5 VDC; 1 Form A, 15W, 200 VDC, 1.25A", Case/Package=SIP, Coil Current=10mA, Coil Voltage (DC)=5V, Contact Current Rating=1A, Contact Resistence=0.15, Insulation Resistance=0, Manufacturer=Comus, Max Operating Temperature=85°C, Min Operating Temperature=-40°C, Switching Voltage=200V, Coil resitence=500, Coil Type=-, Contact Form=1A, Contact Material=-, Height=6.98mm, Manufacturer P/N=3570.1419.051, Mounting Technology=TH, Number of Terminal=4, Operate Time=350µs, Packaging=SIP, Pins=4, Relay Type=Reed, Release Time=100µs, Rise time=0s, RoHS=Yes, Switching Current=1A, Width=15.24mm
MH1 MH2 MH3 MH4: library part CMP-00028-00007-1, "hole 5mm pad drill 2.2", Case/Package=Pad, Max Operating Temperature=-40°C, Min Operating Temperature=125°C, Mounting Technology=Pad, Pins=1, RoHS Compliant=yes
R1: library part R01-0402-01-00169-2, "RES SMD 10K OHM 1% 1/16W 0402", Case/Package=0402, Manufacturer=Yageo, Max Operating Temperature=155°C, Min Operating Temperature=-55°C, Power Rating=62.5mW, Temperature Coefficient="100 ppm/ºC", Tolerance=1%, Voltage Rating=50V, Composition="Thick Film", Features="Automotive AEC-Q200, Moisture Resistant", Height=370µm, Length=990.6µm, Manufacturer P/N=AC0402FR-0710KL, Number of Terminations=2, Packaging="Tape & Reel", RoHS=Yes, Width=508µm
R2 R3 R4 R5 R6 R7 R8 R9 R10 R11 R12 R13 R14 R15 R16 R17 R18 R19 R20 R21 R22 R23 R24 R25 R26 R27 R28 R29 R30 R31 R32 R33 R34 R35 R36 R37 R38 R39 R40 R41 R42 R43 R44 R45 R46: library part R01-0402-01-00437-2, "RES SMD 240 OHM 1% 1/16W 0402", Case/Package=0402, Manufacturer=Yageo, Max Operating Temperature=155°C, Min Operating Temperature=-55°C, Power Rating=62.5mW, Temperature Coefficient="100 ppm/ºC", Tolerance=1%, Voltage Rating=50V, Composition="Thick Film", Features="Automotive AEC-Q200, Moisture Resistant", Height=370µm, Length=990.6µm, Manufacturer P/N=AC0402FR-07240RL, Number of Terminations=2, Packaging="Tape & Reel", RoHS=Yes, Width=508µm
U1 U2 U4 U5 U6 U7: library part CMP-0005-0001-00001-1, "50-V, 7-ch darlington transistor array, -40 to 105C 16-TSSOP -40 to 105", Case/Package=TSSOP, Manufacturer="Texas Instruments", Max Operating Temperature=-40°C, Min Operating Temperature=105°C, Voltage Rating=50V, Height=1.2mm, Length=5mm, Manufacturer P/N=ULN2003AIPWR, Mounting Technology=SMD, Pins=16, RoHS Compliant=yes, Width=4.4mm
U3: library part U01-0007-01-00000-1, "AVR ATmega Microcontroller 8-bit 16MHz 256KB FLASH TQFP100", Case/Package=A, Frequency=16MHz, Manufacturer=Microchip, Max Operating Temperature=85°C, Max Supply Voltage=5.5V, Min Operating Temperature=-40°C, Minimum Supply Voltage=4.5V, Contact Plating=Tin, Core Architecture=AVR, Height=1.2mm, Interface="I2C, SPI, UART", Manufacturer P/N=ATMEGA2560-16AU, Max Frequency=16MHz, Memory Size=256KB, Memory Type=FLASH, Mounting Technology=SMD, Number of A/D="1 AD / 16 channels", Number of I/O=86, Number of Programmable I/O=86, Oscillator Type=External, Peripherals="Brown-out Detect/Reset, POR, PWM, WDT", Pins=100, RAM Size=8KB, RoHS=Yes, Watchdog Timer=Yes, Width=16.25mm
Y1: library part Y01-0001-01-00000-10, "16MHz ±10ppm 16pF 80Ω SMD-2520_4P", Case/Package=SMD-2520_4P, Frequency=16MHz, Load Capacitance=16pF, Max Operating Temperature=85°C, Min Operating Temperature=-40°C, ESR=80, Mounting Technology=SMD, Pins=4, RoHS Compliant=yes

## Free pads (board coordinates)
  round 0.5 on Mech1: 1(0.25,0.25) 1(0.25,0.25) 1(0.25,3937.26) 1(0.25,3937.26) 1(3937.26,0.25) 1(3937.26,0.25) 1(3937.26,3937.26) 1(3937.26,3937.26)

## Via types
v1: diameter 17.72, hole 7.87, L1 to L4, 302 vias

## Nets (pads, with @x,y where several pads share a name; then routed paths per layer and width w, separated by ;. In a path a pad name is that pad's centre, name@x,y a point inside that pad or via, vN(x,y) a via of type N, cw(c..) or ccw(c..) an arc to the next point about the centre after c; other vN are vias at no path point)
+5V: C1.2 C2.2 C3.2 C4.2 C5.2 C6.2 C7.2 C8.2 C9.2 C10.2 C11.2 C12.2 J2.1 J2.3 J2.5 J3.2 J3.4 J3.6 J4.2 J5.1 K1.2 K2.2 K3.2 K4.2 K5.2 K6.2 K7.2 K8.2 K9.2 K10.2 K11.2 K12.2 K13.2 K14.2 K15.2 K16.2 K17.2 K18.2 K19.2 K20.2 K21.2 K22.2 K23.2 K24.2 K25.2 K26.2 K27.2 K28.2 K29.2 K30.2 K31.2 K32.2 K33.2 K34.2 K35.2 K36.2 K37.2 K38.2 K39.2 K40.2 K41.2 K42.2 R1.2 R4.1 R5.1 R6.1 R7.1 R8.1 R9.1 R10.1 R11.1 R12.1 R13.1 R14.1 R15.1 R16.1 R17.1 R18.1 R19.1 R20.1 R21.1 R22.1 R23.1 R24.1 R25.1 R26.1 R27.1 R28.1 R29.1 R30.1 R31.1 R32.1 R33.1 R34.1 R35.1 R36.1 R37.1 R38.1 R39.1 R40.1 R41.1 R42.1 R43.1 R44.1 R45.1 R46.1 U1.9 U2.9 U3.10 U3.31 U3.61 U3.80 U3.98 U3.100 U4.9 U5.9 U6.9 U7.9 | length 3331.6
  L1 w4: R25.1@140,2921.32 143.68,2925 160,2925 v1(185,2950) ; R10.1@140,3105 140,3135 v1(150,3145) ; v1(145,875) 155,865 R23.1@155,830.99 ; v1(145,1075) 145,1073.99 155,1063.99 R6.1@155,1029.69 ; R17.1@155,629.69 155,630.67 177.38,653.05 177.38,662.38 v1(180,665) ; R12.1@165,1239.69 v1(165,1280) ; v1(415,3330) 417.4,3332.4 R21.1@465,3332.4 ; v1(421.3,2503.7) R14.1@460,2503.7 ; v1(422.6,2712.4) R20.1@465,2712.4 ; R18.1@460,1443.7 v1(460,1485) ; R7.1@460,1648.7 v1(460,1690) ; R13.1@460,1863.7 v1(460,1905) ; R19.1@460,2082.4 v1(460,2120) ; R8.1@460,2287.4 v1(460,2330) ; R5.1@535,238.7 535,239.69 545.8,250.48 546.78,250.48 556.3,260 v1(575,260) ; R11.1@540,440 540,440.98 559.02,460 v1(580,460) ; v1(875,675) 878.71,675 883.71,680 898.39,680 915,663.39 R16.1@915,662.4 ; v1(875,885) 892.83,885 903.22,874.61 904.2,874.61 915,863.82 R22.1@915,862.83 ; v1(875,1085) 910,1085 920,1075 R24.1@920,1042.4 ; v1(890,1260) 917.4,1260 R26.1@920,1257.4 ; R9.1@895,2917.4 937.4,2917.4 v1(955,2935) ; R15.1@895,3108.7 v1(895,3170) ; C11.2@1354.92,2589.92 C11.2@1355,2590 ; J2.1@1486.97,310.51 J2.3@1506.65,310.51 J2.5@1526.34,310.51 ; C10.2@1809.92,1114.21 C10.2@1810.71,1115 ; C5.2@1869.29,2185 C5.2@1870,2184.29 ; C1.2@1870,2145 C1.2@1873.78,2148.78 ; C2.2@1870,2539.29 C2.2@1869.29,2540 C2.2@1871.77,2542.48 ; C12.2@2054.29,1190 C12.2@2055.08,1190.79 ; C3.2@2279.37,2759.37 C3.2@2280,2760 ; R4.1@2407.4,3805 v1(2455,3805) ; v1(2625,2130) R1.2@2670,2130 ; C9.2@2824.29,1505 C9.2@2824.37,1505.08 ; C7.2@2824.29,2850 2825.08,2850.79 C7.2@2829.29,2855 ; v1(2975,1310) 3000,1285 R39.1@3000,1252.4 ; R44.1@3000,658.7 3000,659.69 3010.8,670.48 3011.78,670.48 3031.3,690 v1(3040,690) ; R27.1@3000,853.7 3000,854.69 3035,889.69 v1(3035,890) ; R33.1@3000,1053.7 3000,1080 3010,1090 v1(3055,1090) ; R32.1@3400,247.4 v1(3447.4,247.4) ; R38.1@3400,437.4 v1(3442.4,437.4) ; v1(3735,1495) 3743.7,1495 3758.22,1480.48 3759.2,1480.48 3770,1469.69 R28.1@3770,1468.7 ; v1(3755,2510) 3755,2505 3765,2495 R35.1@3765,2467.4 ; R41.1@3755,2678.27 3761.73,2685 v1(3795,2685) ; R36.1@3755,3073.27 3788.27,3073.27 v1(3790,3075) ; R42.1@3755,3268.27 3789.8,3268.27 v1(3791.54,3270) ; R34.1@3760,1653.7 v1(3760,1695) ; R40.1@3760,1852.4 3782.4,1852.4 v1(3795,1865) ; R30.1@3760,2873.27 3761.73,2875 v1(3795,2875) ; R46.1@3765,642.4 3790,667.4 v1(3790,675) ; R31.1@3765,853.7 3765,854.69 3775.8,865.48 3776.78,865.48 3791.3,880 v1(3800,880) ; R37.1@3765,1050 3785,1050 v1(3800,1065) ; R43.1@3765,1258.7 3798.7,1258.7 v1(3800,1260) ; R45.1@3765,2060 v1(3765,2095) ; R29.1@3765,2257.4 3767.6,2260 v1(3800,2260)
  L1 w10: v1(1311.5,1783.5) 1312.24,1784.25 1349.17,1784.25 1349.92,1783.5 U4.9@1349.92,1739.57 ; v1(1315,2590) C11.2@1355,2590 ; U7.9@1354.92,2549.57 C11.2@1354.92,2589.92 ; v1(1770,1115) C10.2@1810.71,1115 ; U2.9@1809.92,1069.57 C10.2@1809.92,1114.21 ; v1(1857.57,2507.57) 1855.14,2505.14 1854.67,2505.14 1854.67,2523.96 C2.2@1870,2539.29 ; C5.2@1869.29,2185 1872.44,2188.15 U3.98@1931.93,2188.15 ; v1(1870,2115) C1.2@1870,2145 C5.2@1870,2184.29 ; C2.2@1871.77,2542.48 U3.80@1931.93,2542.48 ; C1.2@1873.78,2148.78 U3.100@1931.93,2148.78 ; C12.2@2054.29,1190 v1(2095,1190) ; C12.2@2055.08,1190.79 U5.9@2055.08,1235.43 ; v1(2155,1995) 2180,1995 C6.2@2190,2005 2190,2025 2180.94,2034.06 U3.10@2180.94,2076.93 ; v1(2250,2780) 2260.04,2769.96 2270.83,2769.96 2280,2760.79 C3.2@2280,2760 ; U3.61@2279.37,2693.07 C3.2@2279.37,2759.37 ; U3.31@2548.07,2247.2 2602.8,2247.2 2610,2240 C4.2@2610,2218.58 2636.42,2218.58 v1(2650,2205) ; C9.2@2824.29,1505 2825,1504.29 v1(2825,1465) ; C9.2@2825.08,1500.08 U1.9@2825.08,1555.43 ; C7.2@2825.08,2850.79 U6.9@2825.08,2895.43 ; C7.2@2829.29,2855 v1(2875,2855)
  L4 w4: J3.2@1486.97,310.51 J3.4@1506.65,310.51 J3.6@1526.34,310.51
  other v1: 1495,245 1520,245 1495,265 1520,265 1495,365 1520,365 1495,385 1520,385
A: J2.7 J3.8 K1.1 K2.1 K3.1 K4.1 | length 1730.4
  L1 w11.55: K4.1@790,780 K3.1@790,570.99 790,460 830,420 1085,420 1125,380 K2.1@1170,380 K1.1@1170,185 1215,140 1345,140 1375,170 1375,385 1410,420 1525,420 1546.02,398.98 v1(1546.02,378.98) J2.7@1546.02,310.51
  L4 w11.55: J3.8@1546.02,310.51 v1(1546.02,378.98)
ALARM: R2.1 U3.45 | length 2616.6
  L1 w4: R2.1@1500,3805 1595,3805 1640,3760 2140,3760 2180,3720 2580,3720 2620,3680 2620,3150 2600,3130 2525,3130 2485,3090 2485,2885 2520,2850 2570,2850 2615,2805 2615,2720 2655,2680 2655,2555 2622.8,2522.8 U3.45@2548.07,2522.8
B: J2.9 J3.10 K5.1 K6.1 K7.1 K8.1 | length 2286.6
  L1 w11.55: K8.1@1095,1595 K7.1@1095,1390 1095,1355 1080,1340 900,1340 790,1230 K6.1@790,1185 K5.1@790,985.99 790,905 840,855 840,525 910,455 1525,455 1565.71,414.29 v1(1565.71,399.29) J2.9@1565.71,310.51
  L4 w11.55: J3.10@1565.71,310.51 v1(1565.71,399.29)
C: J2.11 J3.12 K9.1 K10.1 K11.1 K12.1 | length 2909.4
  L1 w11.55: K12.1@1095,2450 K11.1@1095,2235 K10.1@1095,2025 K9.1@1095,1810 1095,1740 1175,1660 1175,1320 1130,1275 1055,1275 995,1215 995,515 1015,495 1535,495 1585.45,444.55 1585.45,379.66 v1(1585.39,379.61) J2.11@1585.39,310.51
  L4 w11.55: J3.12@1585.39,310.51 v1(1585.39,379.61)
COIL0: D4.1 K1.3 U2.16 | length 1867.4
  L1 w4: D4.1@535,122.38 537.38,120 845,120 870,145 K1.3@870,185 ; v1(1720,890) 1720.22,890.22 1809.7,890.22 U2.16@1809.92,890.43
  L4 w4: K1.3@870,185 873.64,188.64 873.64,213.64 910,250 1160,250 1255,345 1255,430 1345,520 1345,835 1400,890 v1(1720,890)
COIL1: D10.1 K2.3 U2.15 | length 2174
  L1 w4: D10.1@540,320 605,320 630,295 630,175 665,140 755,140 780,165 780,340 820,380 K2.3@870,380 ; v1(1740,915) 1740.51,915.51 1809.41,915.51 U2.15@1809.92,916.02
  L4 w4: K2.3@870,380 870,340 920,290 1160,290 1225,355 1225,450 1320,545 1320,855 1380,915 v1(1740,915)
COIL2: D16.1 K3.3 U2.11 | length 2178.3
  L1 w4: D16.1@155,510.99 455.99,510.99 487.35,542.35 487.35,568.33 K3.3@490,570.99 ; v1(1740,1020) 1740.81,1019.19 1809.11,1019.19 U2.11@1809.92,1018.39
  L4 w4: K3.3@490,570.99 544.01,625 810,625 845,660 845,955 865,975 925,975 940,990 940,1060 1000,1120 1235,1120 1275,1080 1580,1080 1640,1020 v1(1740,1020)
COIL3: D22.1 K4.3 U4.15 | length 2487
  L1 w4: v1(150.55,675.55) 150.55,679.26 155,683.71 D22.1@155,713.37 ; v1(1275,1585) 1275.51,1585.51 1349.41,1585.51 U4.15@1349.92,1586.02
  L4 w4: K4.3@490,780 490,740 460,710 200,710 165.55,675.55 v1(150.55,675.55) 150.55,824.45 120,855 120,885 130,895 265,895 300,930 300,1080 320,1100 685,1100 715,1130 715,1235 760,1280 1185,1280 1210,1305 1210,1560 1235,1585 v1(1275,1585)
COIL4: D5.1 K5.3 U4.16 | length 2412
  L1 w4: D5.1@155,913.37 175,893.37 v1(175,870) ; v1(1290,1560) 1290.22,1560.22 1349.7,1560.22 U4.16@1349.92,1560.43
  L4 w4: K5.3@490,985.99 490,860 365,735 200,735 175,760 v1(175,870) 355,870 390,905 390,1045 430,1085 715,1085 750,1120 750,1198.77 795.38,1244.14 1199.14,1244.14 1235,1280 1235,1550 1245,1560 v1(1290,1560)
COIL5: D11.1 K6.3 U4.14 | length 1609.6
  L1 w4: D11.1@165,1123.37 180,1108.37 v1(180,1080) ; v1(1295,1610) 1295.81,1610.81 1349.11,1610.81 U4.14@1349.92,1611.61
  L4 w4: v1(180,1080) 230,1130 470,1130 490,1150 K6.3@490,1185 490,1215 510,1235 670,1235 745,1310 1135,1310 1175,1350 1175,1575 1210,1610 v1(1295,1610)
COIL6: D17.1 K7.3 U4.13 | length 1107.1
  L1 w4: D17.1@460,1327.38 462.38,1325 v1(510,1325) ; v1(1270,1630) 1295,1630 1302.2,1637.2 U4.13@1349.92,1637.2
  L4 w4: v1(510,1325) 530,1305 665,1305 750,1390 K7.3@795,1390 840,1390 890,1440 1115,1440 1145,1470 1145,1590 1185,1630 v1(1270,1630)
COIL7: D6.1 K8.3 U4.12 | length 986.1
  L1 w4: D6.1@460,1530 461.97,1530 486.97,1505 v1(500,1505) ; v1(1295,1655) 1298.71,1655 1306.51,1662.8 U4.12@1349.92,1662.8
  L4 w4: v1(500,1505) 740,1505 795,1560 K8.3@795,1595 855,1655 v1(1295,1655)
COIL8: D12.1 K9.3 U4.11 | length 1078.1
  L1 w4: v1(460,1720) D12.1@460,1747.38 ; v1(1270,1685) 1271.69,1686.69 1348.23,1686.69 U4.11@1349.92,1688.39
  L4 w4: v1(460,1720) 690,1720 710,1740 710,1785 735,1810 K9.3@795,1810 825,1810 850,1785 850,1710 875,1685 v1(1270,1685)
COIL9: D21.1 K10.3 U4.10 | length 1221.9
  L1 w4: v1(460,1940) D21.1@460,1967.38 ; v1(1290,1715) 1290.51,1714.49 1349.41,1714.49 U4.10@1349.92,1713.98
  L4 w4: v1(460,1940) 650,1940 735,2025 K10.3@795,2025 855,2025 890,1990 890,1750 925,1715 v1(1290,1715)
COIL10: D7.1 K11.3 U7.16 | length 1068.4
  L1 w4: D7.1@460,2172.38 460,2150 465,2145 v1(480,2145) ; v1(1290,2370) 1290.22,2370.22 1354.7,2370.22 U7.16@1354.92,2370.43
  L4 w4: v1(480,2145) 770,2145 795,2170 K11.3@795,2235 795,2265 820,2290 1160,2290 1240,2370 v1(1290,2370)
COIL11: D13.1 K12.3 U7.15 | length 984
  L1 w4: D13.1@460,2387.38 460,2365 470,2355 v1(485,2355) ; v1(1255,2395) 1255.51,2395.51 1354.41,2395.51 U7.15@1354.92,2396.02
  L4 w4: v1(485,2355) 545,2355 585,2395 670,2395 725,2450 K12.3@795,2450 850,2450 905,2395 v1(1255,2395)
COIL12: D18.1 K13.3 U7.14 | length 1132.1
  L1 w4: v1(465,2550) D18.1@465,2595 ; v1(1285,2420) 1285.81,2420.81 1354.11,2420.81 U7.14@1354.92,2421.61
  L4 w4: v1(465,2550) 630,2550 735,2655 K13.3@795,2655 850,2655 880,2625 880,2560 935,2505 1115,2505 1150,2470 1150,2440 1170,2420 v1(1285,2420)
COIL13: D8.1 K14.3 U7.11 | length 873.6
  L1 w4: v1(895,2755) D8.1@895,2800 ; v1(1255,2500) 1255.81,2499.19 1354.11,2499.19 U7.11@1354.92,2498.39
  L4 w4: v1(895,2755) 1190,2755 ; K14.3@1230,2850 1230,2770 1215,2755 1190,2755 ; v1(1255,2500) 1160,2595 1160,2725 1190,2755
COIL14: D14.1 K15.3 U7.10 | length 1119.4
  L1 w4: D14.1@895,2990 896.97,2990 916.97,2970 1039.14,2970 v1(1040,2970.86) ; v1(1285,2525) 1285.51,2524.49 1354.41,2524.49 U7.10@1354.92,2523.98
  L4 w4: v1(1040,2970.86) 1135.86,2970.86 1170,3005 1170,3040 1190,3060 K15.3@1230,3060 1285,3060 1310,3035 1310,2790 1240,2720 1240,2570 v1(1285,2525)
COIL15: D19.1 K16.3 U6.16 | length 3852.6
  L1 w4: D19.1@465,3215 565,3215 585,3235 585,3295 620,3330 670,3330 720,3280 K16.3@795,3280 ; U6.16@2825.08,3074.57 2825.3,3074.78 2899.78,3074.78 v1(2900,3075)
  L4 w4: K16.3@795,3280 850,3280 895,3325 1155,3325 1205,3275 1440,3275 1460,3295 1460,3430 1535,3505 2435,3505 2450,3520 2450,3550 2470,3570 2525,3570 2555,3540 2555,3510 2565,3500 3155,3500 3200,3455 3200,3185 3170,3155 3050,3155 2970,3075 v1(2900,3075)
COIL16: D24.1 K17.3 U7.12 | length 3182.9
  L1 w4: D24.1@140,2805 140,2780 v1(160,2760) 210,2760 240,2730 v1(330,2730) ; v1(1285,2475) 1286.1,2473.9 1353.82,2473.9 U7.12@1354.92,2472.8
  L4 w4: v1(160,2760) 190,2790 1105,2790 1125,2810 1125,2870 1095,2900 505,2900 K17.3@465,2860 ; v1(330,2730) 355,2730 375,2750 835,2750 860,2725 1000,2725 1025,2700 1025,2590 1050,2565 1145,2565 1235,2475 v1(1285,2475)
COIL17: D9.1 K18.3 U7.13 | length 3561.3
  L1 w4: D9.1@140,2989.57 140,2968.71 145,2963.71 v1(145,2960) v1@142.38,2962.62 ; v1(1255,2450) 1256.4,2448.6 1353.52,2448.6 U7.13@1354.92,2447.2
  L4 w4: v1(145,2960) 130,2945 130,2750 150,2730 205,2730 ; K18.3@465,3045 465,2990 500,2955 1095,2955 1155,2895 1155,2795 1135,2775 810,2775 250,2775 205,2730 ; v1(1255,2450) 1225,2450 1140,2535 1020,2535 995,2560 995,2685 975,2705 545,2705 515,2675 260,2675 205,2730
COIL18: D15.1 K19.3 U2.14 | length 2077.8
  L1 w4: v1(915,510) D15.1@915,545 ; v1(1715,940) 1715.81,940.81 1809.11,940.81 U2.14@1809.92,941.61
  L4 w4: v1(915,510) 970,510 1015,555 1015,1015 1045,1045 1120,1045 1145,1020 1145,845 1190,800 1190,630 1212.1,607.9 1232.1,607.9 K19.3@1240,600 1240,610 1290,660 1290,870 1360,940 v1(1715,940)
COIL19: D20.1 K20.3 U2.13 | length 1510.7
  L1 w4: v1(915,705) D20.1@915,745 ; v1(1740,965) 1741.1,966.1 1808.82,966.1 U2.13@1809.92,967.2
  L4 w4: v1(915,705) 960,705 980,725 980,1030 1020,1070 1155,1070 1180,1045 1180,965 1240,905 ; K20.3@1240,800 1240,905 ; v1(1740,965) 1300,965 1240,905
COIL20: D23.1 K21.3 U2.12 | length 1196.3
  L1 w4: v1(920,895) D23.1@920,925 ; v1(1710,990) 1711.4,991.4 1808.52,991.4 U2.12@1809.92,992.8
  L4 w4: v1(920,895) 945,895 960,910 960,1045 1010,1095 1185,1095 1240,1040 K21.3@1240,1000 ; K21.3@1235,1000 K21.3@1240,1000 ; v1(1710,990) 1630,990 1570,1050 1350,1050 1300,1000 K21.3@1240,1000
COIL21: D25.1 K22.3 U2.10 | length 1041.3
  L1 w4: v1(915,1105) 915,1122.38 925,1132.38 D25.1@920,1137.38 ; v1(1710,1045) 1710.51,1044.49 1809.41,1044.49 U2.10@1809.92,1043.98
  L4 w4: v1(915,1105) 940,1105 990,1155 1205,1155 K22.3@1245,1195 ; K22.3@1245,1200 K22.3@1245,1195 ; v1(1710,1045) 1665,1045 1595,1115 1320,1115 1245,1190 K22.3@1245,1195
COIL22: D31.1 K23.3 U5.10 | length 2271.2
  L1 w4: U5.10@2055.08,1261.02 2055.59,1260.51 2154.49,1260.51 v1(2155,1260) ; K23.3@3070,190 3070,155 3115,110 3382.62,110 D31.1@3400,127.38
  L4 w4: v1(2155,1260) 2155,940 2225,870 2500,870 2565,805 2565,445 2760,250 3050,250 3070,230 K23.3@3070,190
COIL23: D37.1 K24.3 U5.11 | length 2591.8
  L1 w4: U5.11@2055.08,1286.61 2055.89,1285.81 2124.19,1285.81 v1(2125,1285) ; K24.3@3070,385 3125,385 3160,350 3160,165 3185,140 3325,140 3345,160 3345,290 3372.38,317.38 D37.1@3400,317.38
  L4 w4: v1(2125,1285) 2165,1285 2185,1265 2185,950 2240,895 2525,895 2590,830 2590,465 2760,295 3050,295 3070,315 K24.3@3070,385
COIL24: D45.1 K25.3 U5.16 | length 2537.3
  L1 w4: U5.16@2055.08,1414.57 2055.3,1414.78 2154.78,1414.78 v1(2155,1415) ; D45.1@3765,522.38 3770,517.38 v1(3770,480)
  L4 w4: v1(2155,1415) 2270,1415 2355,1330 2635,1330 2710,1255 2710,1125 2750,1085 3030,1085 3085,1030 3085,660 3110,635 3380,635 3425,590 K25.3@3435,590 3440,590 3440,595 3475,630 3630,630 3645,615 3645,510 3675,480 v1(3770,480)
COIL25: D30.1 K26.3 U1.10 | length 2085.8
  L1 w4: U1.10@2825.08,1581.02 2825.59,1580.51 2909.49,1580.51 v1(2910,1580) ; v1(3755,690) 3755,691.01 3765,701.01 D30.1@3765,732.38
  L4 w4: v1(2910,1580) 2920,1580 2940,1560 2940,1315 2890,1265 2770,1265 2750,1245 2750,1150 2790,1110 3130,1110 3180,1060 3180,900 3225,855 3415,855 3435,835 K26.3@3435,795 3435,720 3465,690 v1(3755,690)
COIL26: D36.1 K27.3 U1.11 | length 1462.9
  L1 w4: U1.11@2825.08,1606.61 2826.77,1608.31 2938.31,1608.31 v1(2940,1610) ; v1(3765,895) D36.1@3765,930
  L4 w4: v1(2940,1610) 2955,1610 2970,1595 2970,1430 3140,1260 3330,1260 3365,1225 3365,1155 3405,1115 3405,1025 K27.3@3435,995 3438.64,991.36 3473.64,991.36 3570,895 v1(3765,895)
COIL27: D41.1 K28.3 U1.12 | length 1388.4
  L1 w4: U1.12@2825.08,1632.2 2826.48,1633.6 2908.6,1633.6 v1(2910,1635) ; v1(3765,1095) D41.1@3765,1140
  L4 w4: v1(2910,1635) 2975,1635 3000,1610 3000,1440 3135,1305 3380,1305 3435,1250 K28.3@3435,1195 3435,1115 3455,1095 v1(3765,1095)
COIL28: D27.1 K29.3 U1.13 | length 1254.7
  L1 w4: U1.13@2825.08,1657.8 2826.48,1656.4 2938.6,1656.4 v1(2940,1655) ; v1(3770,1310) D27.1@3770,1347.38
  L4 w4: v1(2940,1655) 3310,1655 3435,1530 K29.3@3435,1400 3435,1325 3460,1300 3760,1300 v1(3770,1310)
COIL29: D33.1 K30.3 U1.14 | length 1074.5
  L1 w4: U1.14@2825.08,1683.39 2826.77,1681.69 2908.31,1681.69 v1(2910,1680) ; D33.1@3760,1529.57 3760.43,1530 v1(3795,1530)
  L4 w4: v1(2910,1680) 3360,1680 K30.3@3440,1600 3440,1590 3500,1530 v1(3795,1530)
COIL30: D42.1 K31.3 U1.15 | length 1090
  L1 w4: U1.15@2825.08,1708.98 2825.59,1709.49 2939.49,1709.49 v1(2940,1710) ; D42.1@3760,1735 v1(3795,1735)
  L4 w4: v1(2940,1710) 3379.85,1710 3435,1765.15 K31.3@3435,1800 3515,1800 3580,1735 v1(3795,1735)
COIL31: D44.1 K32.3 U1.16 | length 1265.2
  L1 w4: U1.16@2825.08,1734.57 2906.72,1734.57 2911.29,1730 v1(2915,1730) ; v1(3765,1895) D44.1@3765,1940
  L4 w4: v1(2915,1730) 2925,1740 3305,1740 3360,1795 3360,1955 3405,2000 K32.3@3435,2000 3485,2000 3520,1965 3520,1915 3540,1895 v1(3765,1895)
COIL32: D28.1 K33.3 U6.10 | length 1639.3
  L1 w4: U6.10@2825.08,2921.02 2825.59,2920.51 2889.49,2920.51 v1(2890,2920) ; D28.1@3765,2136.08 3766.08,2135 v1(3795,2135)
  L4 w4: v1(2890,2920) 2950,2920 2990,2880 2990,2350 3050,2290 3345,2290 K33.3@3435,2200 3435,2195 3440,2195 3500,2135 v1(3795,2135)
COIL33: D34.1 K34.3 U6.11 | length 1447.7
  L1 w4: U6.11@2825.08,2946.61 2826.77,2948.31 2933.31,2948.31 v1(2935,2950) ; v1(3760,2305) 3760,2340 D34.1@3765,2345
  L4 w4: v1(2935,2950) 2955,2950 3020,2885 3020,2540 3070,2490 3305,2490 3390,2405 K34.3@3435,2405 3535,2305 v1(3760,2305)
COIL34: D39.1 K35.3 U6.12 | length 1769.8
  L1 w4: U6.12@2825.08,2972.2 2826.18,2971.1 2893.9,2971.1 v1(2895,2970) ; D39.1@3755,2554.57 3755.43,2555 v1(3795,2555)
  L4 w4: v1(2895,2970) 2970,2970 3050,2890 3050,2570 3080,2540 3305,2540 3375,2610 K35.3@3435,2610 3515,2530 3515,2380 3540,2355 3670,2355 3695,2380 3695,2530 3720,2555 v1(3795,2555)
COIL35: D29.1 K36.3 U6.13 | length 1112.8
  L1 w4: U6.13@2825.08,2997.8 2826.48,2996.4 2933.6,2996.4 v1(2935,2995) ; v1(3755,2720) 3755,2749.57 D29.1@3760,2754.57
  L4 w4: v1(2935,2995) 3025,2995 3120,2900 3378.22,2900 3435,2843.22 K36.3@3435,2815 3436.3,2813.7 3436.3,2788.7 3470,2755 3720,2755 v1(3755,2720)
COIL36: D35.1 K37.3 U6.14 | length 1077.9
  L1 w4: U6.14@2825.08,3023.39 2825.89,3024.19 2899.19,3024.19 v1(2900,3025) ; v1(3755,2915) D35.1@3755,2954.57
  L4 w4: v1(2900,3025) 3020,3025 3095,3100 3345,3100 3530,2915 v1(3755,2915)